# Altium PCB BlinkBoard.PcbDoc (part 1 of 2)
Units mm, origin at the board's own origin, x right, y up, seen from the top; angles counter-clockwise.
Board outline 80 x 102 mm, 4 copper layers (Top Layer, Int1 (GND), Int2 (PWR), Bottom Layer), stack 1.369 mm thick; 153 components, 150 nets, 495 pads, 127 vias.
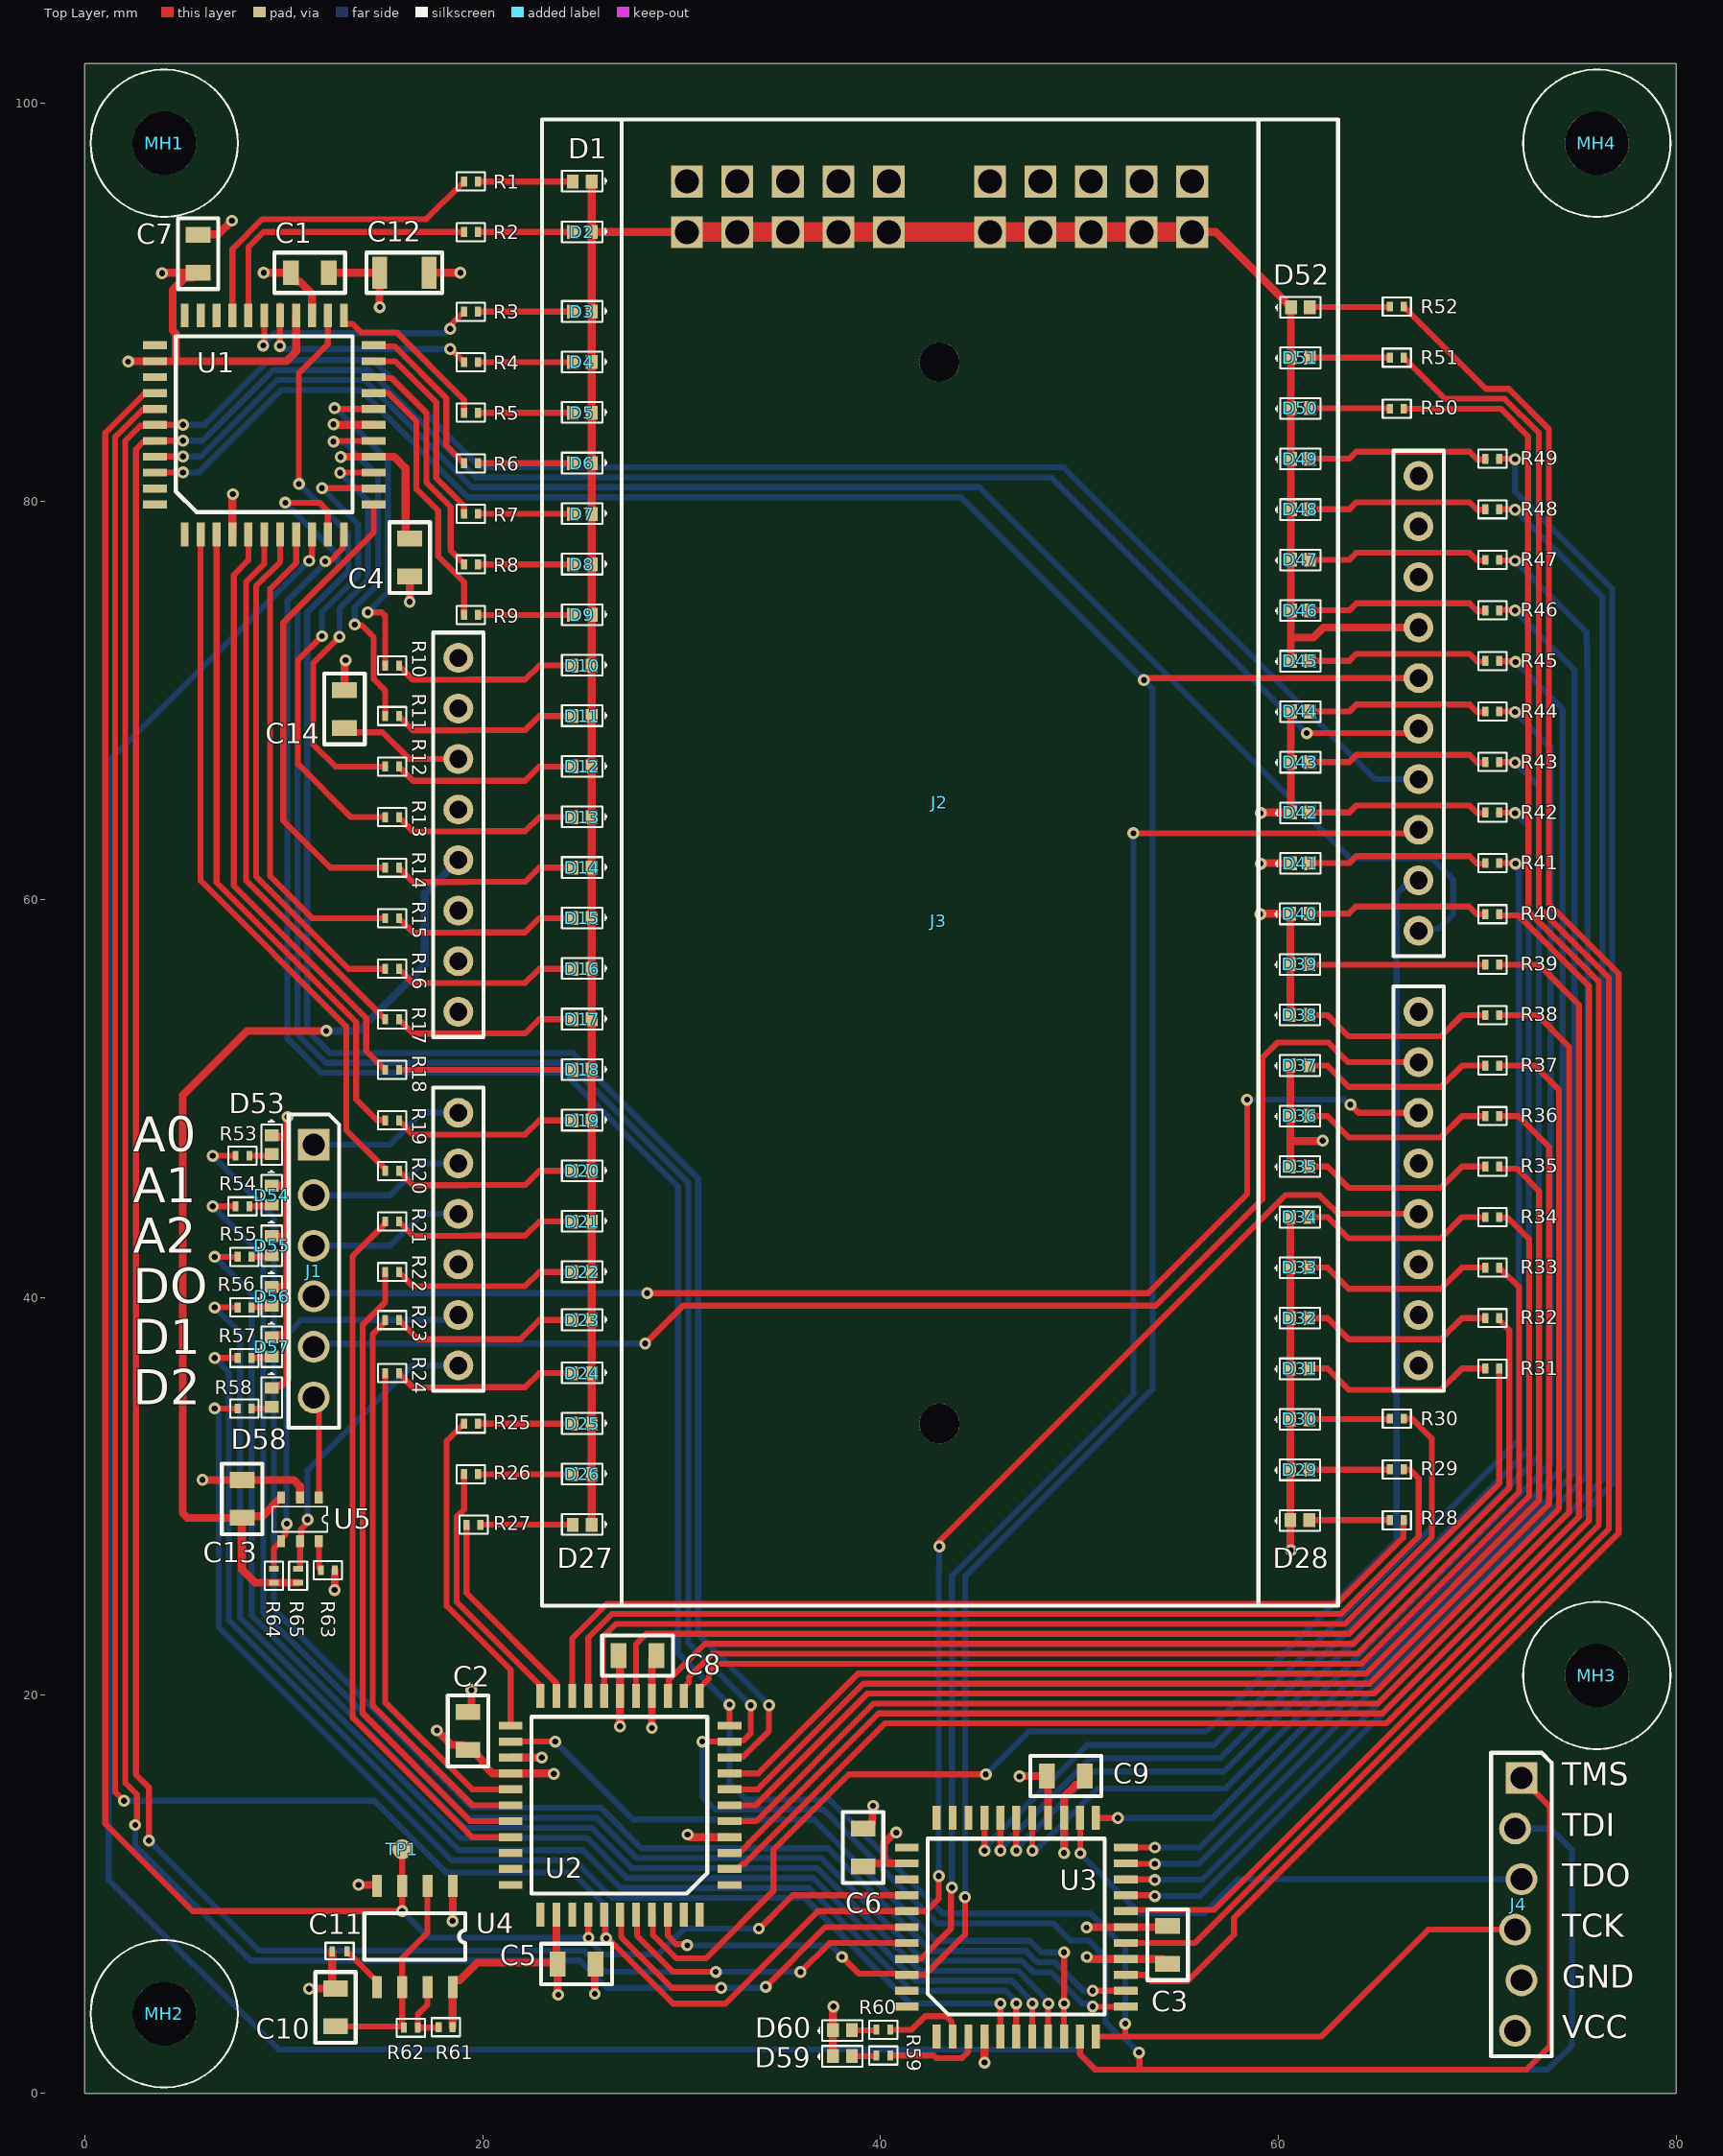
[diagram p0: Top Layer view]
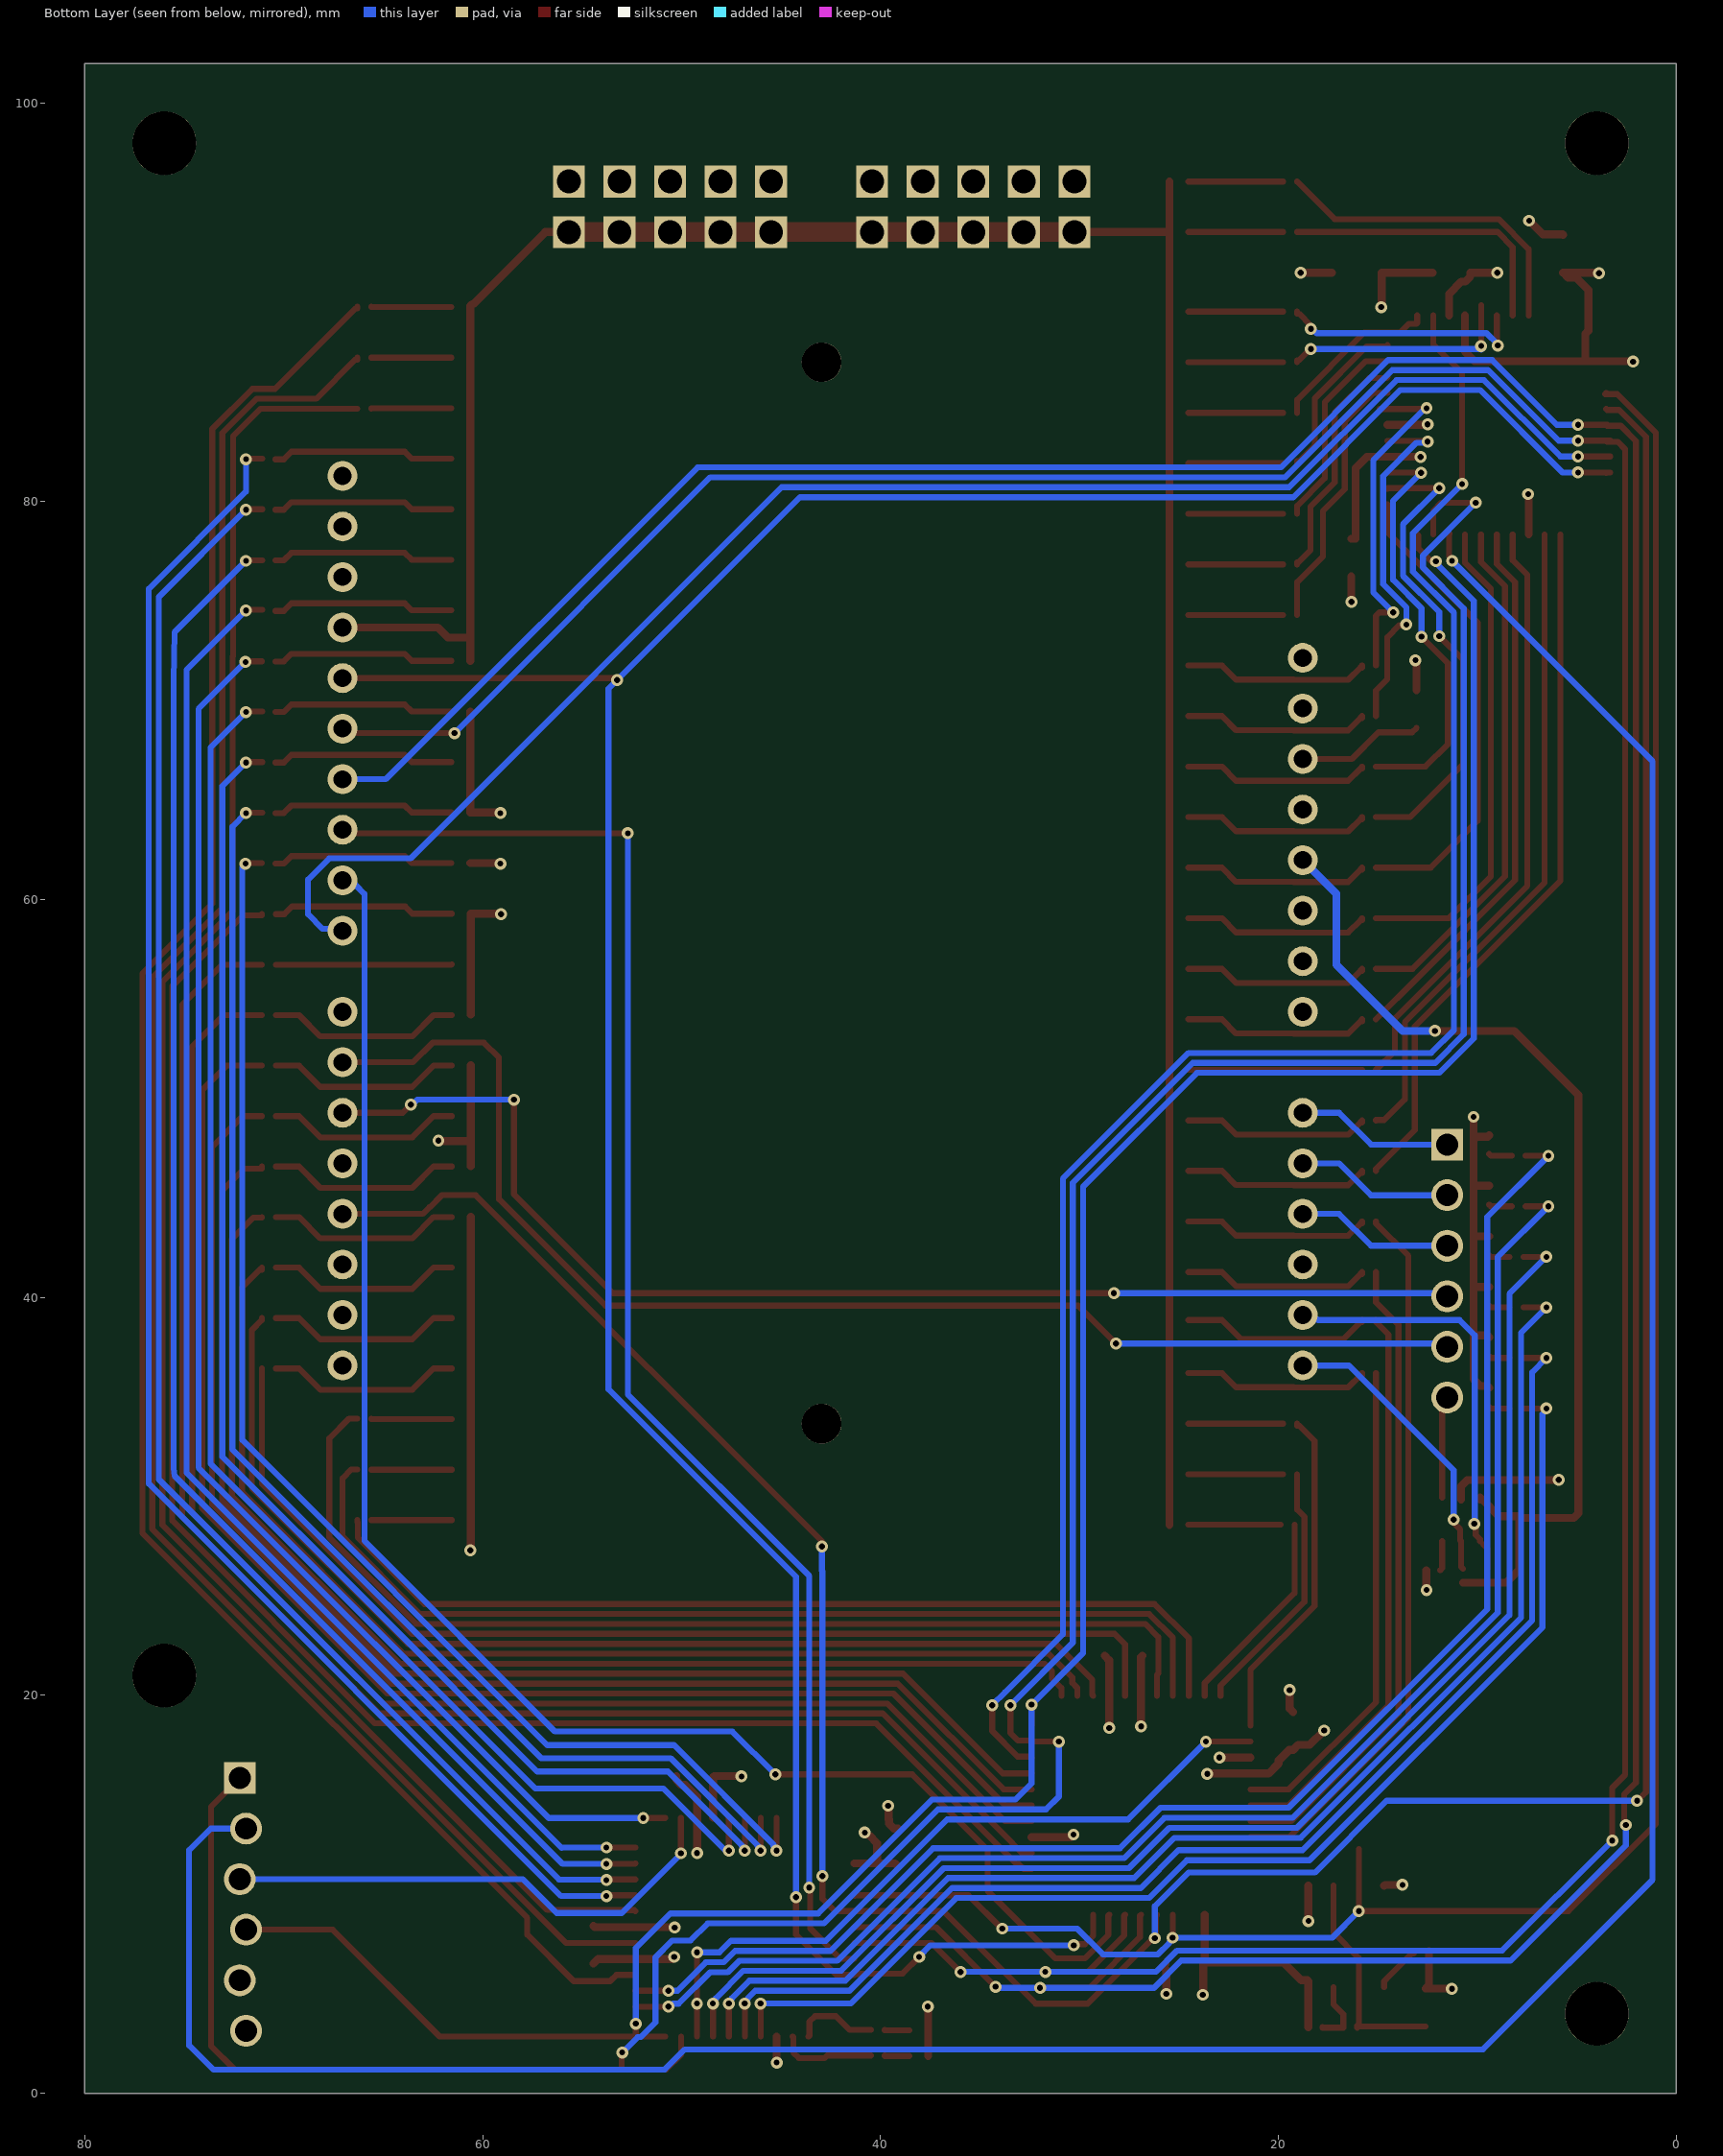
[diagram p1: Bottom Layer view, seen from below]
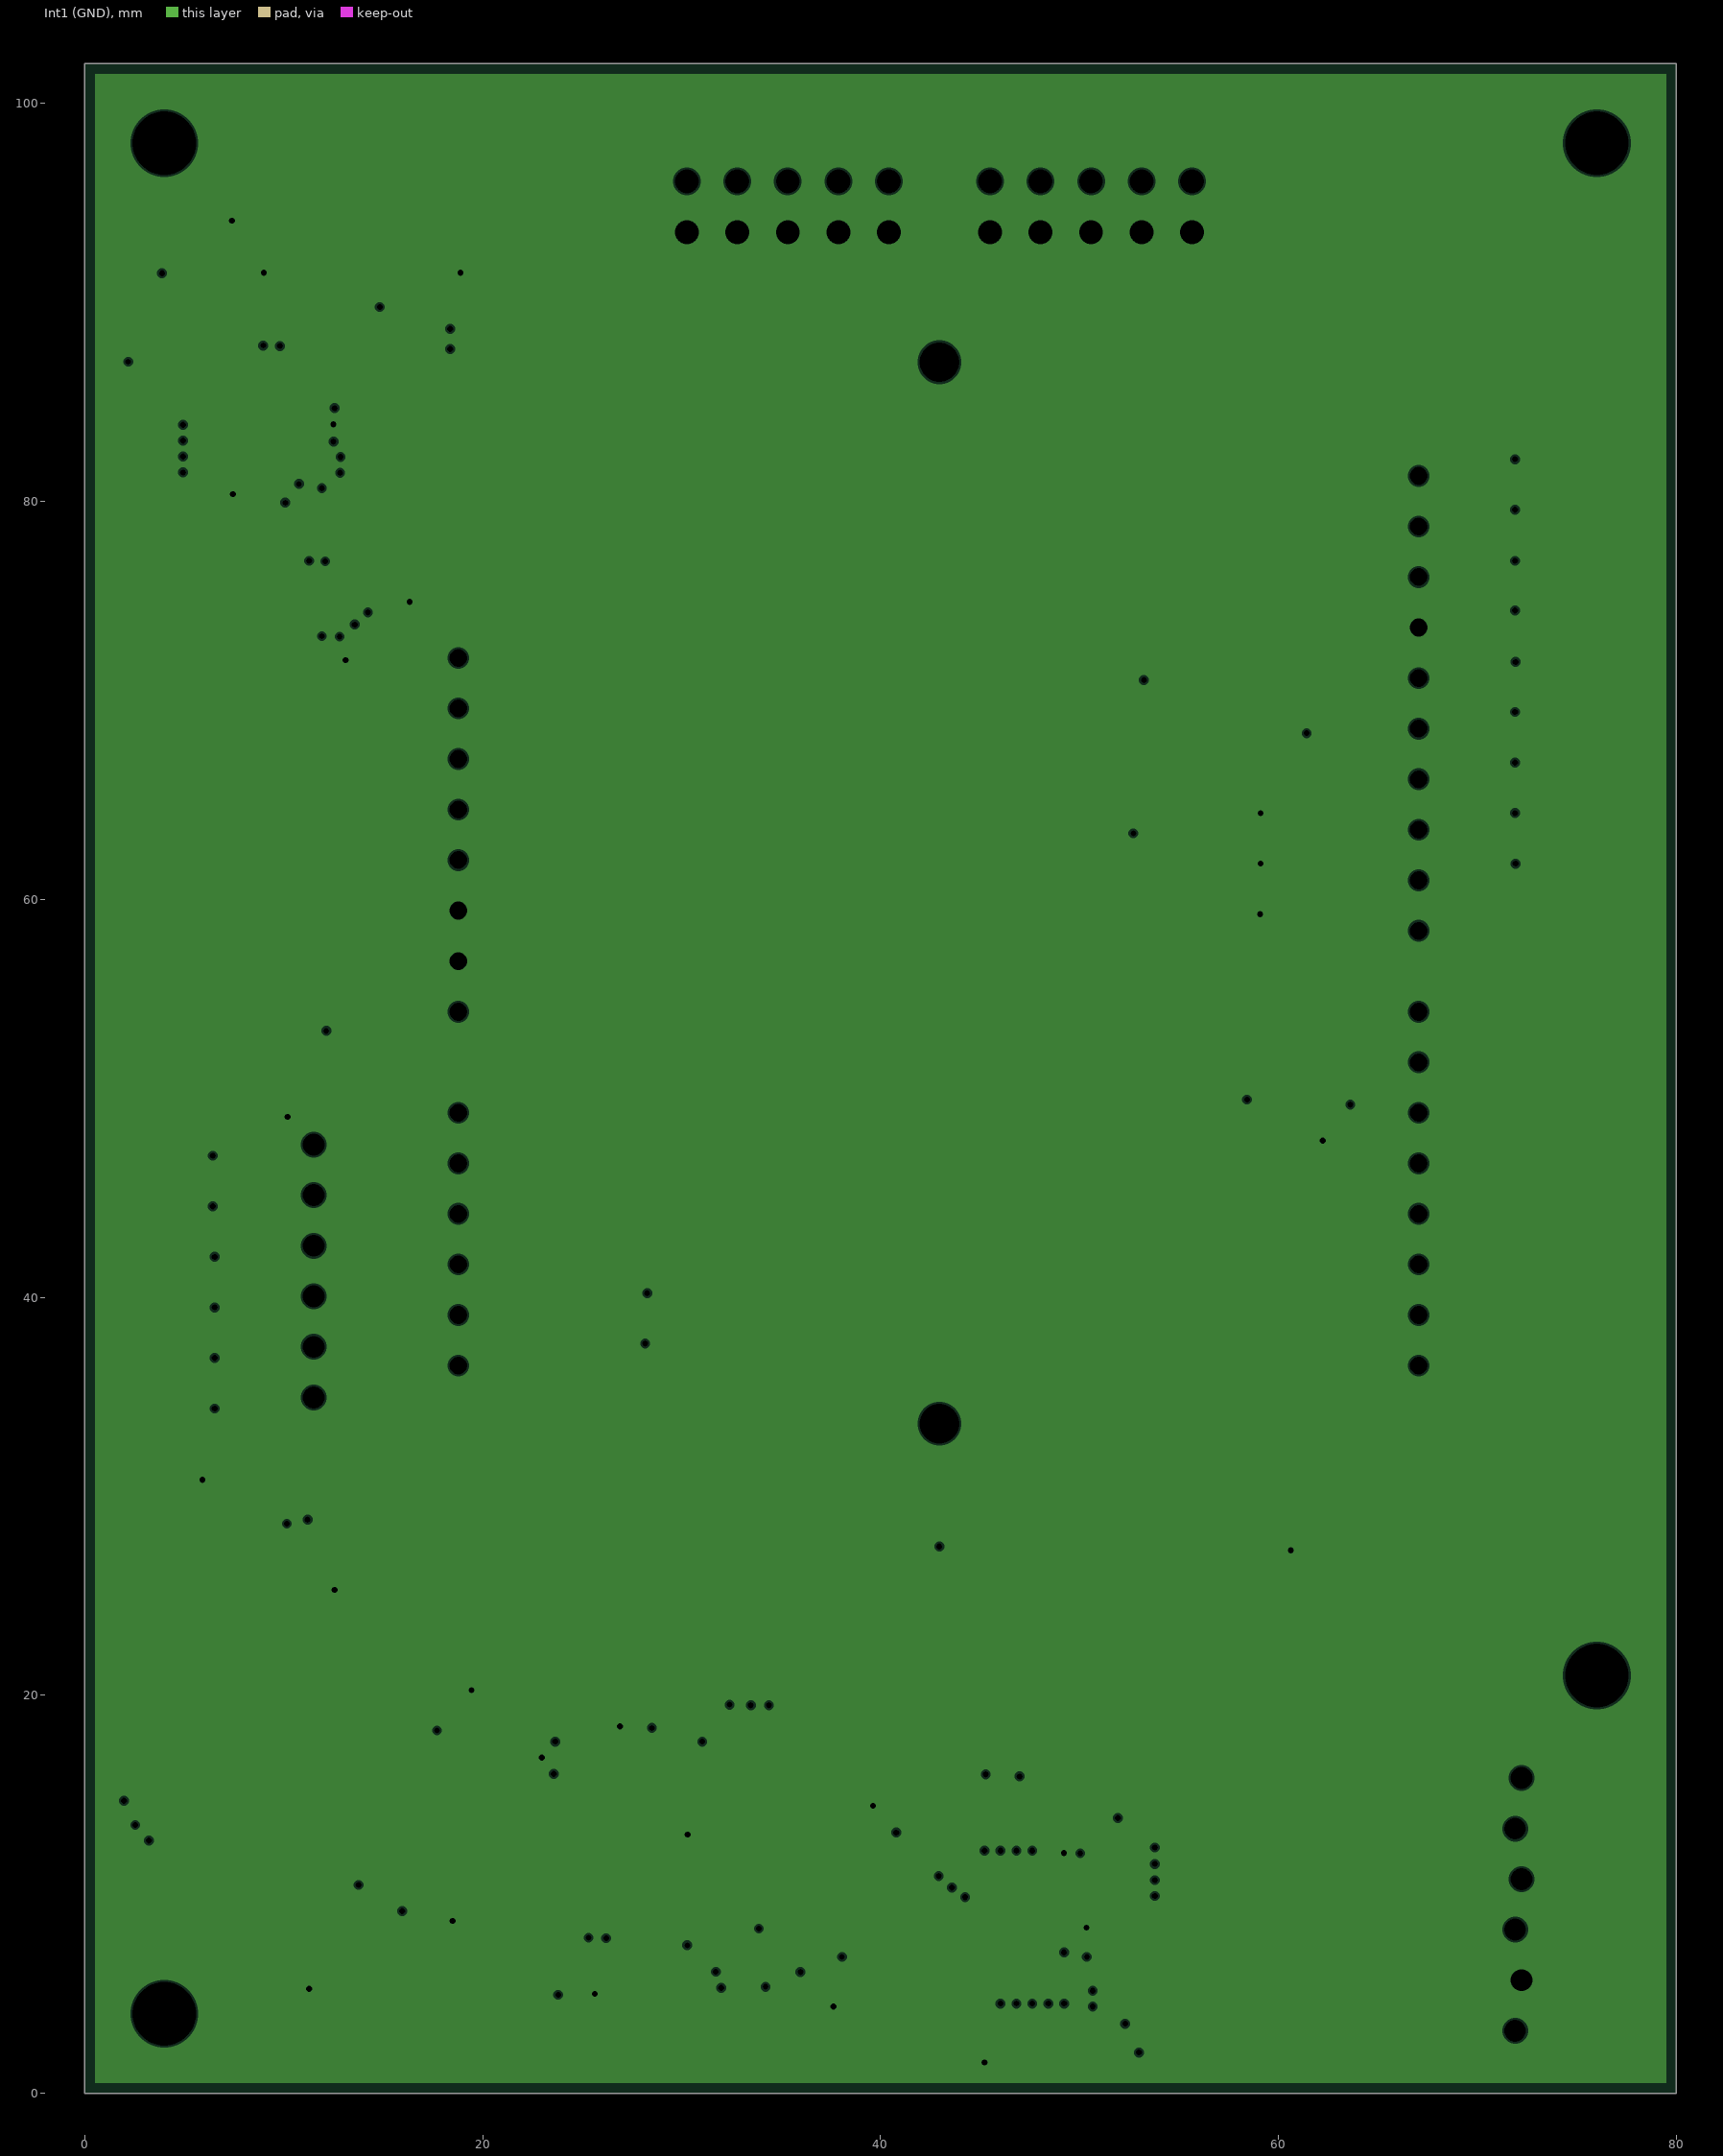
[diagram p2: Int1 (GND), clearances drawn from the general rule]
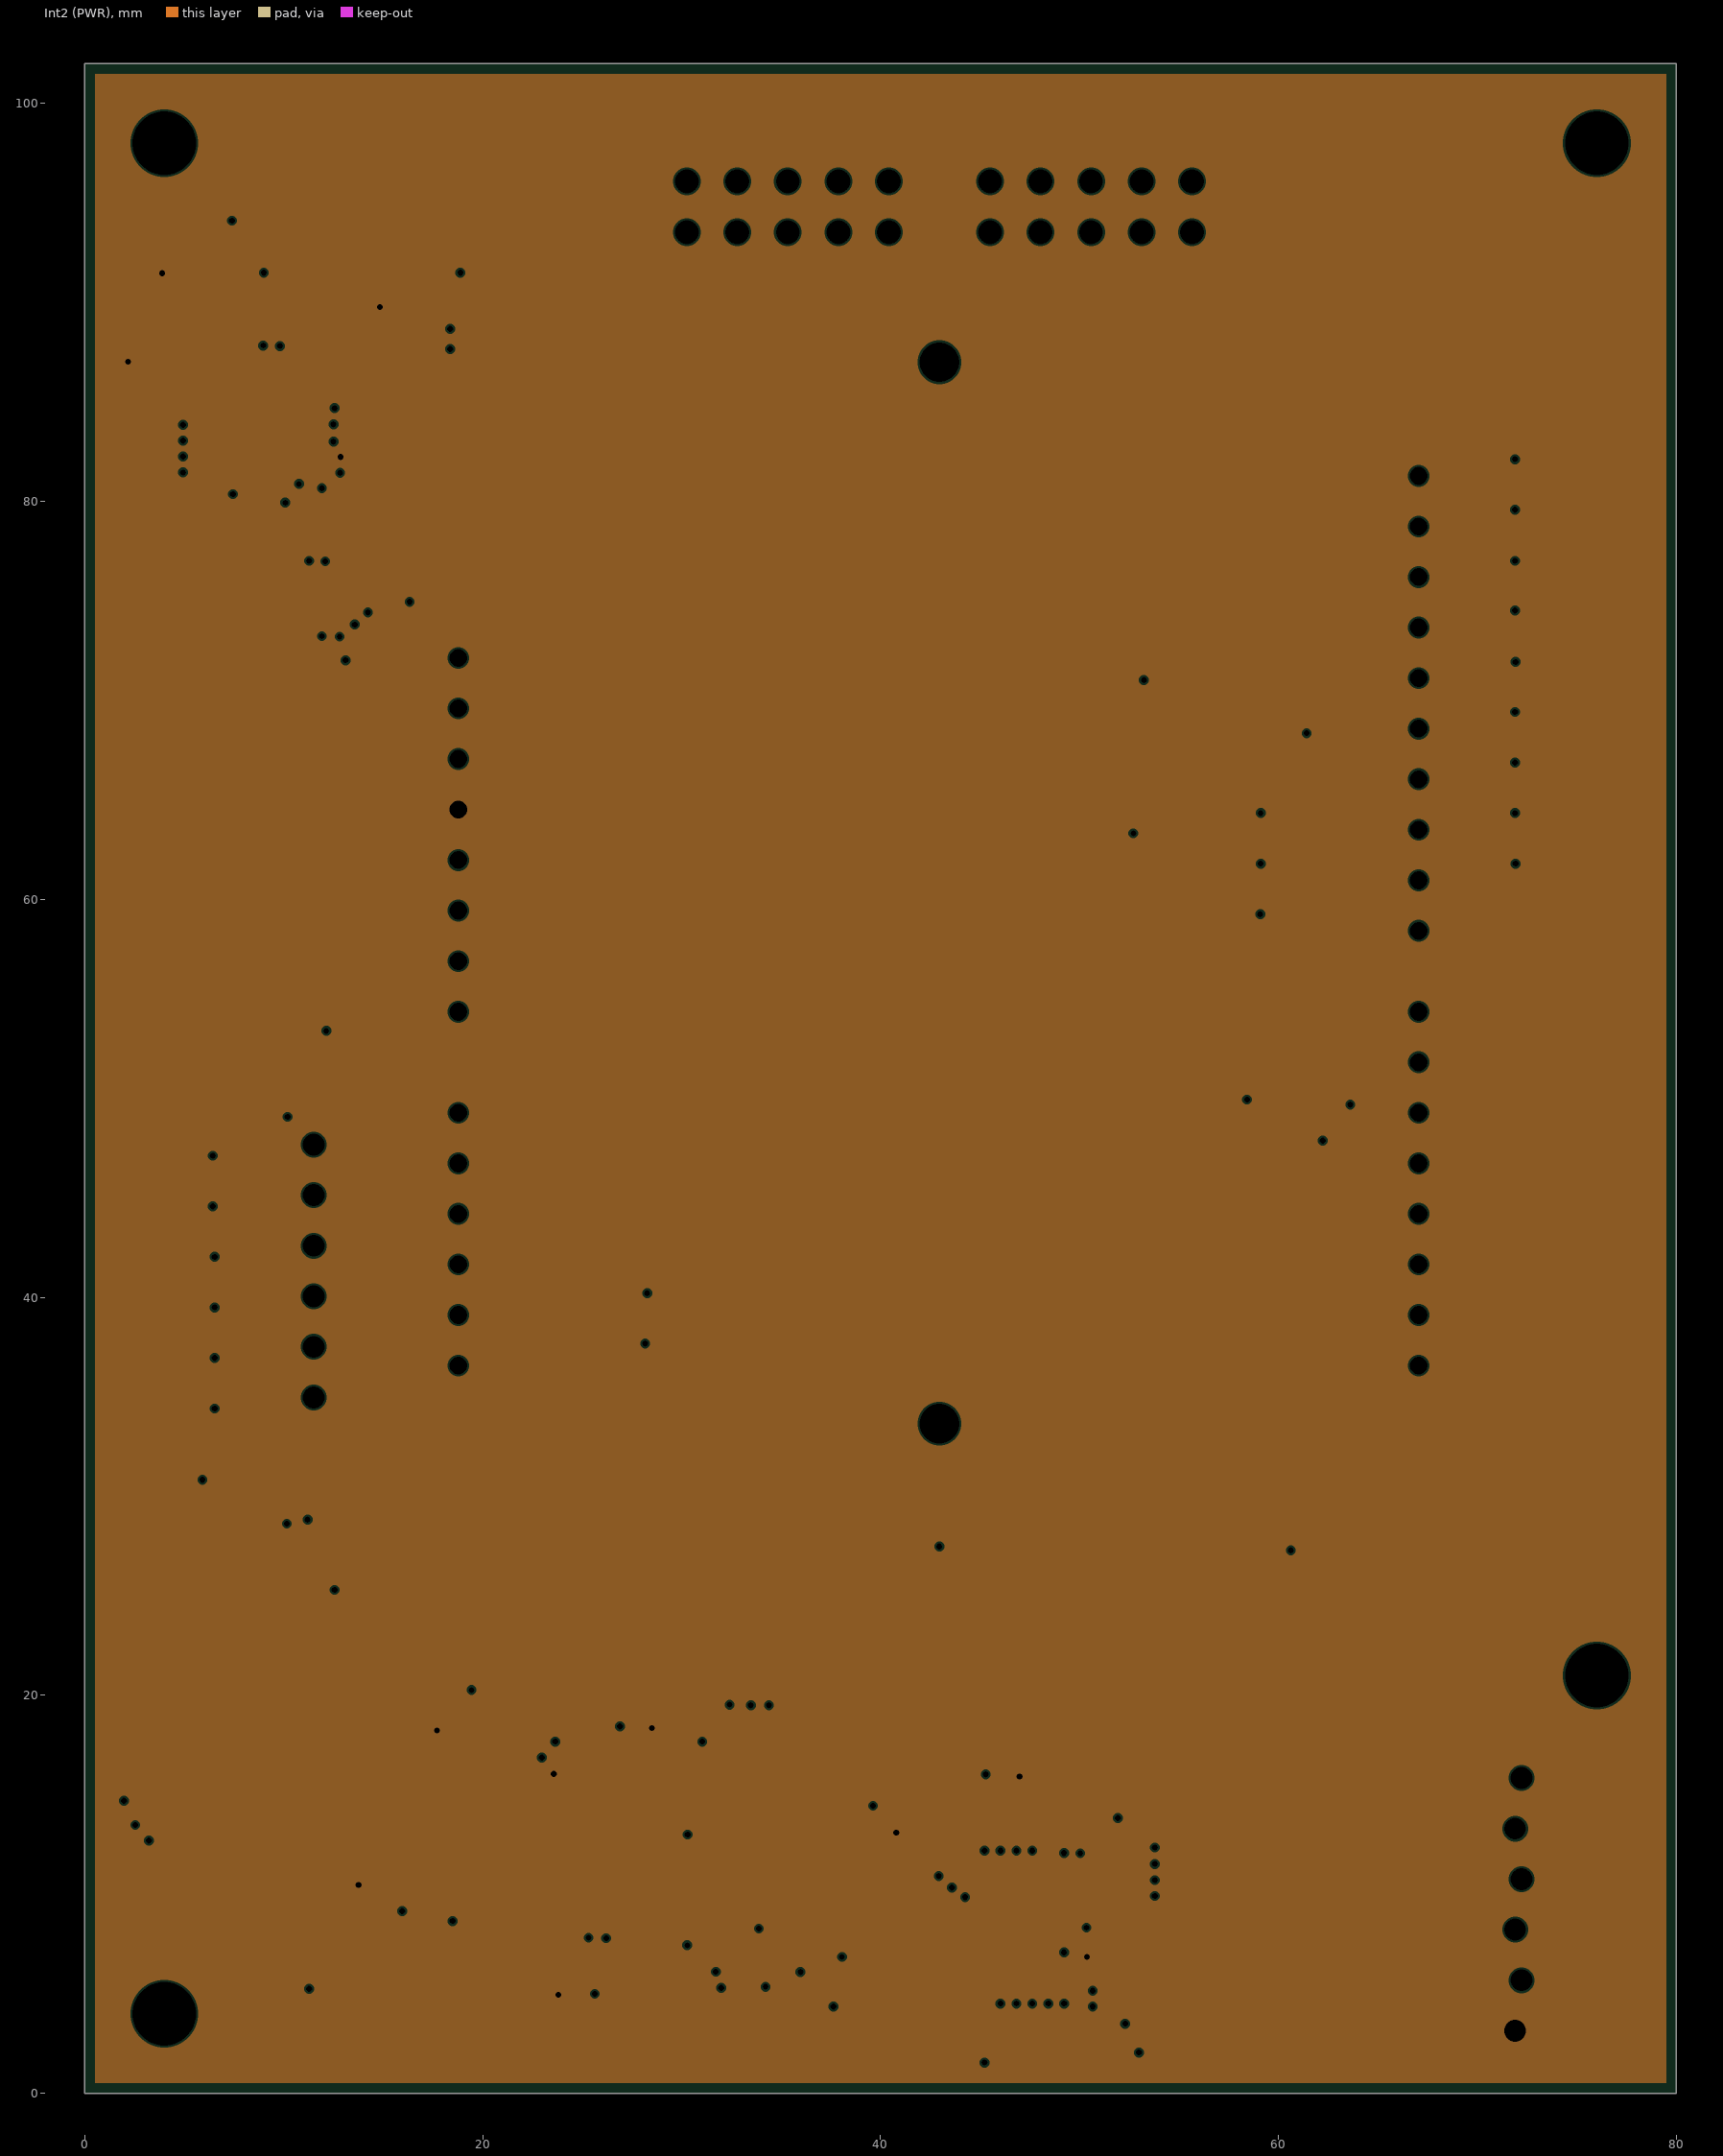
[diagram p3: Int2 (PWR), clearances drawn from the general rule]
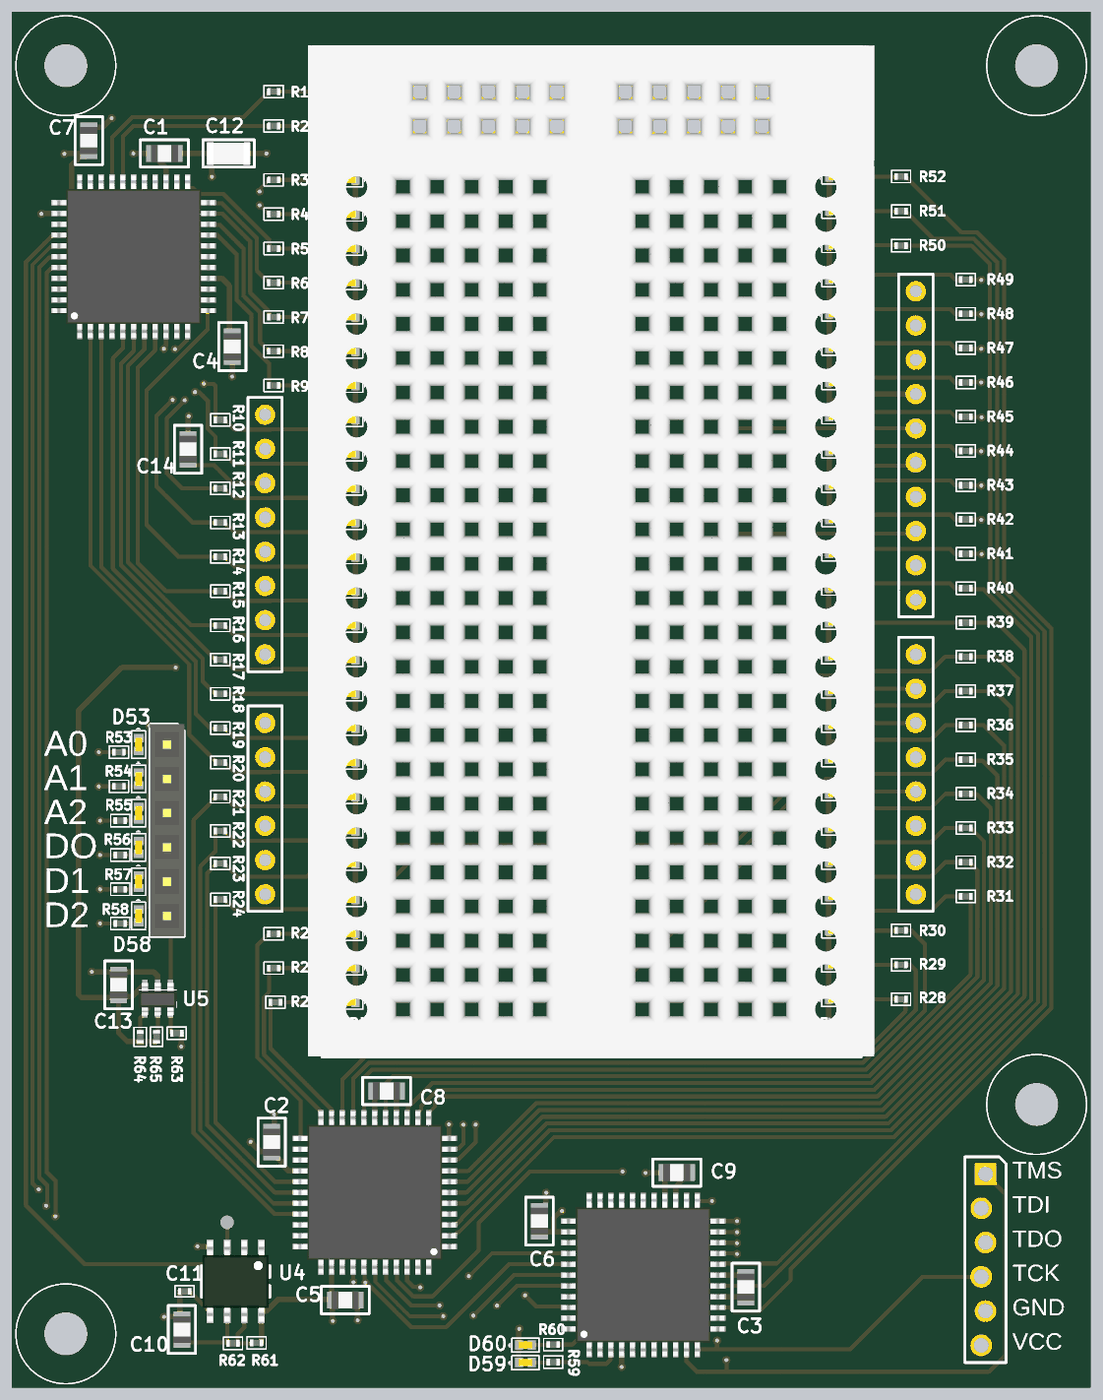
[diagram p5: 3D render of the assembled board from above, using the file's embedded part models]

## Layer stack, top to bottom
Top Solder: solder mask 0.0254, SM-001, Dk 4
Top Layer: signal copper 0.035
Dielectric 1: prepreg 0.1295, PP-017, Dk 4.3
Dielectric 2: prepreg 0.1295, PP-017, Dk 4.3
Int1 (GND): plane copper 0.035, net GND
Dielectric 3: core 0.7112, Core-039, Dk 4.8
Int2 (PWR): plane copper 0.035, net +3V3
Dielectric 4: prepreg 0.1295, PP-017, Dk 4.3
Dielectric 5: prepreg 0.1295, PP-017, Dk 4.3
Bottom Layer: signal copper 0.035
Bottom Solder: solder mask 0.0254, SM-001, Dk 4

## Board outline
0,0 80,0 80,102 0,102

## Design rules (kind name [scope] priority, off if disabled: settings)
Clearance "Around polygon" [IsRegion] p1: gap=0.3 ignorepadtopadclearanceinfootprint=FALSE
Clearance [All] p2: gap=0.2 ignorepadtopadclearanceinfootprint=FALSE
ComponentClearance [All] p1: gap=0.2 collisioncheckmode=3 verticalgap=0.2 showdistances=FALSE
ComponentClearance ComponentClearance_J2 [InComponent('J2')] p2: gap=0.2 collisioncheckmode=3 verticalgap=0 showdistances=FALSE
ComponentClearance ComponentClearance_J3 [InComponent('J3')] p3: gap=0.2 collisioncheckmode=3 verticalgap=0 showdistances=FALSE
HoleSize [All] p1: absolutevalues=TRUE maxlimit=3.5 minlimit=0.2 maxpercent=80.000 minpercent=20.000
HoleToHoleClearance [All] p1: gap=0.305 allowstackedmicrovias=TRUE
MinimumSolderMaskSliver [All] p1: minsoldermaskwidth=0.3
PlaneClearance [All] p1: clearance=0.1
PlaneConnect [All] p1: planeconnectstyle=Direct reliefexpansion=0.508 reliefentries=4 reliefconductorwidth=0.254 reliefairgap=0.254
PolygonConnect [All] p1: connectstyle=Direct reliefconductorwidth=0.254 reliefentries=4 polygonreliefangle="90 Angle" airgapwidth=0.254
RoutingVias [All] p1: holewidth=0.3 width=0.6 viastyle="Through Hole" minholewidth=0.3 minwidth=0.6 maxholewidth=0.3 maxwidth=0.6
SilkToSilkClearance [All] p1: silktosilkclearance=0.1
SilkToSolderMaskClearance [IsPad] p1: minsilkscreentomaskgap=0.1 clearancetoexposedcopper=TRUE
SolderMaskExpansion [All] p1: expansion=0.02
Width Width_POWER [InNet ('+*') or InNet('GND')] p1: maxlimit=3 minlimit=0.4 preferedwidth=0.4
Width [All] p2: maxlimit=0.5 minlimit=0.3 preferedwidth=0.4
22 further rules are at their usual default settings.

## Classes and differential pairs
component class LEDcontroller: C1 C2 C3 C4 C5 C6 C7 C8 C9 D1 D2 D3 D4 D5 D6 D7 D8 D9 D10 D11 D12 D13 D14 D15 D16 D17 D18 D19 D20 D21 D22 D23 D24 D25 D26 D27 D28 D29 D30 D31 D32 D33 D34 D35 D36 D37 D38 D39 D40 D41 D42 D43 D44 D45 D46 D47 D48 D49 D50 D51 D52 D53 D54 D55 D56 D57 D58 D59 D60 R1 R2 R3 R4 R5 R6 R7 R8 R9 R10 R11 R12 R13 R14 R15 R16 R17 R18 R19 R20 R21 R22 R23 R24 R25 R26 R27 R28 R29 R30 R31 R32 R33 R34 R35 R36 R37 R38 R39 R40 R41 R42 R43 R44 R45 R46 R47 R48 R49 R50 R51 R52 R53 R54 R55 R56 R57 R58 R59 R60 U1 U2 U3
component class BlinkBoard: C10 C11 C12 C13 C14 J1 J2 J3 J4 MH1 MH2 MH3 MH4 R61 R62 R63 R64 R65 TP1 U4 U5

## Components (designator, comment, footprint, x,y, rotation, side; value= is the part's Value field where it differs from the comment)
C1 "47n" C0805 11.312,91.49 r0 top
C2 "47n" C0805 19.263,18.211 r270 top
C3 "47n" C0805 54.432,7.468 r270 top
C4 "47n" C0805 16.342,77.174 r90 top
C5 "47n" C0805 24.724,6.501 r180 top
C6 "47n" C0805 39.125,12.356 r270 top
C7 "47n" C0805 5.699,92.445 r270 top
C8 "47n" C0805 27.788,21.996 r0 top
C9 "47n" C0805 49.311,15.95 r180 top
C10 "1u" C0805 12.608,4.317 r270 top
C11 "10n" C0402 12.811,7.136 r0 top
C12 "100u" C1206 16.068,91.49 r180 top
C13 "1u" C0805 7.909,29.869 r270 top
C14 "10u" C0805 13.063,69.571 r270 top
D1 "LED0402_RED" LED0402 25.003,96.074 r0 top
D2 "LED0402_RED" LED0402 25.003,93.534 r0 top
D3 "LED0402_RED" LED0402 25.003,89.534 r0 top
D4 "LED0402_RED" LED0402 25.003,86.994 r0 top
D5 "LED0402_RED" LED0402 25.003,84.454 r0 top
D6 "LED0402_RED" LED0402 25.003,81.914 r0 top
D7 "LED0402_RED" LED0402 25.003,79.374 r0 top
D8 "LED0402_RED" LED0402 25.003,76.834 r0 top
D9 "LED0402_RED" LED0402 25.003,74.294 r0 top
D10 "LED0402_RED" LED0402 25.003,71.754 r0 top
D11 "LED0402_RED" LED0402 25.003,69.214 r0 top
D12 "LED0402_RED" LED0402 25.003,66.674 r0 top
D13 "LED0402_RED" LED0402 25.003,64.134 r0 top
D14 "LED0402_RED" LED0402 25.003,61.594 r0 top
D15 "LED0402_RED" LED0402 25.003,59.054 r0 top
D16 "LED0402_RED" LED0402 25.003,56.514 r0 top
D17 "LED0402_RED" LED0402 25.003,53.974 r0 top
D18 "LED0402_RED" LED0402 25.003,51.434 r0 top
D19 "LED0402_RED" LED0402 25.003,48.894 r0 top
D20 "LED0402_RED" LED0402 25.003,46.354 r0 top
D21 "LED0402_RED" LED0402 25.003,43.814 r0 top
D22 "LED0402_RED" LED0402 25.003,41.274 r0 top
D23 "LED0402_RED" LED0402 25.003,38.861 r0 top
D24 "LED0402_RED" LED0402 25.003,36.194 r0 top
D25 "LED0402_RED" LED0402 25.003,33.654 r0 top
D26 "LED0402_RED" LED0402 25.003,31.114 r0 top
D27 "LED0402_RED" LED0402 25.003,28.574 r0 top
D28 "LED0402_RED" LED0402 61.071,28.803 r180 top
D29 "LED0402_RED" LED0402 61.071,31.343 r180 top
D30 "LED0402_RED" LED0402 61.071,33.883 r180 top
D31 "LED0402_RED" LED0402 61.071,36.423 r180 top
D32 "LED0402_RED" LED0402 61.071,38.963 r180 top
D33 "LED0402_RED" LED0402 61.071,41.503 r180 top
D34 "LED0402_RED" LED0402 61.071,44.043 r180 top
D35 "LED0402_RED" LED0402 61.071,46.583 r180 top
D36 "LED0402_RED" LED0402 61.071,49.123 r180 top
D37 "LED0402_RED" LED0402 61.071,51.663 r180 top
D38 "LED0402_RED" LED0402 61.071,54.203 r180 top
D39 "LED0402_RED" LED0402 61.071,56.743 r180 top
D40 "LED0402_RED" LED0402 61.071,59.283 r180 top
D41 "LED0402_RED" LED0402 61.096,61.823 r180 top
D42 "LED0402_RED" LED0402 61.096,64.363 r180 top
D43 "LED0402_RED" LED0402 61.096,66.903 r180 top
D44 "LED0402_RED" LED0402 61.096,69.443 r180 top
D45 "LED0402_RED" LED0402 61.096,71.983 r180 top
D46 "LED0402_RED" LED0402 61.096,74.523 r180 top
D47 "LED0402_RED" LED0402 61.096,77.063 r180 top
D48 "LED0402_RED" LED0402 61.096,79.603 r180 top
D49 "LED0402_RED" LED0402 61.096,82.143 r180 top
D50 "LED0402_RED" LED0402 61.096,84.683 r180 top
D51 "LED0402_RED" LED0402 61.096,87.223 r180 top
D52 "LED0402_RED" LED0402 61.096,89.763 r180 top
D53 "LED0402_RED" LED0402 9.407,47.675 r90 top
D54 "LED0402_RED" LED0402 9.407,45.135 r90 top
D55 "LED0402_RED" LED0402 9.407,42.595 r90 top
D56 "LED0402_RED" LED0402 9.407,40.055 r90 top
D57 "LED0402_RED" LED0402 9.407,37.515 r90 top
D58 "LED0402_RED" LED0402 9.407,34.975 r90 top
D59 "LED0402_RED" LED0402 38.084,1.879 r180 top
D60 "LED0402_RED" LED0402 38.084,3.174 r180 top
J1 "HDR_6_PINS" HDR6_100MIL 11.516,47.675 r270 top
J2 "BREADBOARD" BREADBOARD 28.94,89.534 r0 top locked
J3 "UNO_SHEILD" ARDUINO_UNO_SHIELD 67.04,36.575 r270 top locked
J4 "JTAG CPLD" JTAG 72.209,15.846 r270 top
MH1 "MH 3.2mm NP" MH3.2MM 4,98 r0 top
MH2 "MH 3.2mm NP" MH3.2MM 4,4 r0 top
MH3 "MH 3.2mm NP" MH3.2MM 76,21 r0 top
MH4 "MH 3.2mm NP" MH3.2MM 76,98 r0 top
R1 "62" RES0402 19.415,96.074 r0 top
R2 "62" RES0402 19.415,93.534 r0 top
R3 "62" RES0402 19.415,89.534 r0 top
R4 "62" RES0402 19.415,86.994 r0 top
R5 "62" RES0402 19.415,84.454 r0 top
R6 "62" RES0402 19.415,81.914 r0 top
R7 "62" RES0402 19.415,79.374 r0 top
R8 "62" RES0402 19.415,76.834 r0 top
R9 "62" RES0402 19.415,74.294 r0 top
R10 "62" RES0402 15.453,71.754 r0 top
R11 "62" RES0402 15.453,69.214 r0 top
R12 "62" RES0402 15.453,66.674 r0 top
R13 "62" RES0402 15.453,64.134 r0 top
R14 "62" RES0402 15.453,61.594 r0 top
R15 "62" RES0402 15.453,59.054 r0 top
R16 "62" RES0402 15.453,56.514 r0 top
R17 "62" RES0402 15.453,53.974 r0 top
R18 "62" RES0402 15.453,51.434 r0 top
R19 "62" RES0402 15.453,48.894 r0 top
R20 "62" RES0402 15.453,46.354 r0 top
R21 "62" RES0402 15.453,43.814 r0 top
R22 "62" RES0402 15.453,41.274 r0 top
R23 "62" RES0402 15.453,38.861 r0 top
R24 "62" RES0402 15.453,36.194 r0 top
R25 "62" RES0402 19.415,33.654 r0 top
R26 "62" RES0402 19.415,31.114 r0 top
R27 "62" RES0402 19.542,28.574 r0 top
R28 "62" RES0402 65.948,28.803 r180 top
R29 "62" RES0402 65.948,31.356 r180 top
R30 "62" RES0402 65.948,33.908 r180 top
R31 "62" RES0402 70.748,36.423 r180 top
R32 "62" RES0402 70.748,38.96 r180 top
R33 "62" RES0402 70.748,41.498 r180 top
R34 "62" RES0402 70.748,44.035 r180 top
R35 "62" RES0402 70.748,46.572 r180 top
R36 "62" RES0402 70.748,49.109 r180 top
R37 "62" RES0402 70.748,51.646 r180 top
R38 "62" RES0402 70.748,54.183 r180 top
R39 "62" RES0402 70.748,56.72 r180 top
R40 "62" RES0402 70.748,59.257 r180 top
R41 "62" RES0402 70.748,61.823 r180 top
R42 "62" RES0402 70.748,64.363 r180 top
R43 "62" RES0402 70.748,66.903 r180 top
R44 "62" RES0402 70.748,69.443 r180 top
R45 "62" RES0402 70.748,71.983 r180 top
R46 "62" RES0402 70.748,74.523 r180 top
R47 "62" RES0402 70.748,77.063 r180 top
R48 "62" RES0402 70.748,79.603 r180 top
R49 "62" RES0402 70.748,82.143 r180 top
R50 "62" RES0402 65.948,84.657 r180 top
R51 "62" RES0402 65.948,87.223 r180 top
R52 "62" RES0402 65.948,89.788 r180 top
R53 "62" RES0402 7.934,47.116 r0 top
R54 "62" RES0402 7.934,44.576 r0 top
R55 "62" RES0402 8.036,42.036 r0 top
R56 "62" RES0402 8.036,39.496 r0 top
R57 "62" RES0402 8.036,36.956 r0 top
R58 "62" RES0402 8.036,34.416 r0 top
R59 "62" RES0402 40.141,1.904 r180 top
R60 "62" RES0402 40.141,3.199 r180 top
R61 "47k" RES0402 18.145,3.326 r0 top
R62 "120k" RES0402 16.392,3.301 r0 top
R63 "10k" RES0402 12.226,26.288 r180 top
R64 "10k" RES0402 9.509,26.009 r270 top
R65 "10k" RES0402 10.728,26.014 r270 top
TP1 "TEST POINT" "TEST POINT" 15.961,12.267 r90 top
U1 "XC9572XL-10VQG44C" VQFP44 9.026,83.844 r90 top locked
U2 "XC9572XL-10VQG44C" VQFP44 26.908,14.477 r180 top locked
U3 "XC9572XL-10VQG44C" VQFP44 46.822,8.356 r90 top locked
U4 "NE555DR" 8-SOIC 16.596,7.883 r270 top locked
U5 "MCP4725A0T-E/CH (2)" SOT23-6 10.83,28.853 r270 top locked

## Footprints (in the part's own frame and the unit in brackets; to place one, negate y for a bottom-side part, rotate by r counter-clockwise, add the part's x,y. Pads: shape width x height; smd on the part's side, far side on the other; paste and mask are expansions set on the pad)
8-SOIC [mm]
  rect 1.1x0.5 smd mask+0.02: 1(-2.55,1.905) 2(-2.55,0.635) 3(-2.55,-0.635) 4(-2.55,-1.905) 5(2.55,-1.905) 6(2.55,-0.635) 7(2.55,0.635) 8(2.55,1.905)
  silkscreen extent -1.17,-2.54 1.17,2.54, body extent -3,-2.45 3,2.45, height 1.75
ARDUINO_UNO_SHIELD [mm]
  round 1.5 hole 0.9: 1(0,0) 2(-2.54,0) 3(-5.08,0) 4(-7.62,0) 5(-10.16,0) 6(-12.7,0) 7(-15.24,0) 8(-17.78,0) 9(-21.844,0) 10(-24.384,0) 11(-26.924,0) 12(-29.464,0) 13(-32.004,0) 14(-34.544,0) 15(-37.084,0) 16(-39.624,0) 17(0,-48.26) 18(-2.54,-48.26) 19(-5.08,-48.26) 20(-7.62,-48.26) 21(-10.16,-48.26) 22(-12.7,-48.26) 23(-17.78,-48.26) 24(-20.32,-48.26) 25(-22.86,-48.26) 26(-25.4,-48.26) 27(-27.94,-48.26) 28(-30.48,-48.26) 29(-33.02,-48.26) ""(-44.704,0) ""(-42.164,0) ""(-35.56,-48.26)
  silkscreen extent -45.97,-49.53 1.27,1.27
BREADBOARD [mm]
  rect 1.6x1.6 hole 1.2: 1(1.321,6.54) 1(3.861,6.54) 1(6.401,6.54) 1(8.941,6.54) 1(11.481,6.54) 1(16.561,6.54) 1(19.101,6.54) 1(21.641,6.54) 1(24.181,6.54) 1(26.721,6.54) 2(1.321,4) 2(3.861,4) 2(6.401,4) 2(8.941,4) 2(11.481,4) 2(16.561,4) 2(19.101,4) 2(21.641,4) 2(24.181,4) 2(26.721,4)
  round 2 hole 2 unplated: ""(14.021,-55.88) ""(14.021,-2.54)
  silkscreen extent -5.95,-65.02 34.05,9.65, body extent -6.98,-64.98 35.02,9.99, height 8.31
C0402 [mm]
  rect 0.25x0.5 smd mask+0.02: 1(-0.375,0) 2(0.375,0)
  silkscreen extent -0.71,-0.41 0.71,0.43, body extent -0.5,-0.25 0.5,0.25, height 0.25
C0805 [mm]
  rect 0.8x1.25 smd mask+0.02: 1(-0.95,0) 2(0.95,0)
  silkscreen extent -1.78,-1.02 1.78,1.02, body extent -1,-0.66 1,0.66, height 0.74
C1206 [mm]
  rect 0.75x1.6 smd mask+0.02: 1(-1.25,0) 2(1.25,0)
  silkscreen extent -1.91,-1.02 1.91,1.02, body extent -1.6,-0.83 1.6,0.83, height 1.57
HDR6_100MIL [mm]
  rect 1.6x1.6 hole 1.1: 1(0,0)
  round 1.6 hole 1.1: 2(2.54,0) 3(5.08,0) 4(7.62,0) 5(10.16,0) 6(12.7,0)
  silkscreen extent -1.52,-1.27 14.22,1.27, body extent -1.52,-1.27 14.22,1.27, height 8.51
JTAG [mm]
  rect 1.6x1.6 hole 1.1: 1(0,0)
  round 1.6 hole 1.1: 2(2.54,-0.317) 3(5.08,0) 4(7.62,-0.317) 5(10.16,0) 6(12.7,-0.317)
  silkscreen extent -1.27,-1.52 13.97,1.52
LED0402 [mm]
  rect 0.6x0.7 smd mask+0.02: 1(-0.475,0) 2(0.475,0)
  silkscreen extent -1.02,-0.51 1.27,0.53, body extent -0.5,-0.25 0.5,0.25, height 0.32
MH3.2MM [mm] "MHNP 3.2mm"
  round 3.2 hole 3.2 unplated: 1(0,0)
  silkscreen extent -3.7,-3.7 3.7,3.7
RES0402 [mm]
  rect 0.3x0.5 smd mask+0.02: 1(-0.35,0) 2(0.35,0)
  silkscreen extent -0.71,-0.46 0.71,0.46, body extent -0.5,-0.25 0.5,0.25, height 0.25
SOT23-6 [mm]
  rect 0.6x0.4 smd mask+0.02: 1(-1.092,0.94) 2(-1.092,-0.01) 3(-1.092,-0.96) 4(1.108,-0.96) 5(1.108,-0.01) 6(1.108,0.94)
  silkscreen extent -0.64,-1.4 0.64,1.37, body extent -1.16,-1.42 1.27,1.37, height 1.1
"TEST POINT" [mm]
  round 1 smd mask+0.02: 1(0,0)
VQFP44 [mm]
  rect 1.2x0.4 smd mask+0.02: 1(-5.5,4) 2(-5.5,3.2) 3(-5.5,2.4) 4(-5.5,1.6) 5(-5.5,0.8) 6(-5.5,0) 7(-5.5,-0.8) 8(-5.5,-1.6) 9(-5.5,-2.4) 10(-5.5,-3.2) 11(-5.5,-4) 23(5.5,-4) 24(5.5,-3.2) 25(5.5,-2.4) 26(5.5,-1.6) 27(5.5,-0.8) 28(5.5,0) 29(5.5,0.8) 30(5.5,1.6) 31(5.5,2.4) 32(5.5,3.2) 33(5.5,4)
  rect 0.4x1.2 smd mask+0.02: 12(-4,-5.5) 13(-3.2,-5.5) 14(-2.4,-5.5) 15(-1.6,-5.5) 16(-0.8,-5.5) 17(0,-5.5) 18(0.8,-5.5) 19(1.6,-5.5) 20(2.4,-5.5) 21(3.2,-5.5) 22(4,-5.5) 34(4,5.5) 35(3.2,5.5) 36(2.4,5.5) 37(1.6,5.5) 38(0.8,5.5) 39(0,5.5) 40(-0.8,5.5) 41(-1.6,5.5) 42(-2.4,5.5) 43(-3.2,5.5) 44(-4,5.5)
  silkscreen extent -4.38,-4.44 4.44,4.44, body extent -6.01,-6.01 6.01,6.01, height 1.35

## Part data
C1 C2 C3 C4 C5 C6 C7 C8 C9: library part C0805_47n, "Cap Ceramic 0.047uF 50V X7R 5% SMD 0805 125C Paper T/R", Capacitance=47nF, Case/Package=0805, Case Code (Metric)=2012, Dielectric=X7R, Manufacturer=Yageo, Manufacturer Part Number=CC0805JRX7R9BB473, Max Operating Temperature=125°C, Min Operating Temperature=-55°C, Supplier Part Number 1=311-3553-6-ND, Tolerance=5%, Voltage Rating=50V, Case Code (Imperial)=0805, ComponentLink4Description=https://datasheet.ciiva.com/11587/upy-gphc-x7r-6-3v-to-50v-8-11587207.pdf?src-supplier=Avnet, ComponentLink4URL=https://datasheet.ciiva.com/11587/upy-gphc-x7r-6-3v-to-50v-8-11587207.pdf?src-supplier=Avnet, Composition=Ceramic, Depth=1.25mm, Halogen Free="Halogen Free", Height=0.85mm, Lead Free="Lead Free", Length=2mm, Mount="Surface Mount", Packaging="Tape and Reel", Pricing 1="1 = 0.21000, 10 = 0.14700, 100 = 0.06900, 500 = 0.04838, 1000 = 0.04005 (USD)", Radiation Hardening=No, RoHS=Yes, Stock 1=8317, Supplier 1=Digi-Key, Termination=SMD/SMT, Thickness=0.037inch, Voltage Rating (DC)=50V, Weight=0.000194oz, Width=1.25mm
C10 C13: library part C0805_1u, "CERAMIC CAPACITOR, 1UF, 25V, Y5V, +80, -20%, 0805, FULL REEL; Product Range:CC Series; Capacitance:1 F; Capacitance Tolerance:+80%, -20%; Dielectric Characteristic:Y5V; Voltage Rating:25V; Ceramic Capacitor Case:0805 [2012 Metric] ;RoHS Compliant: Yes", Capacitance=1uF, Case/Package=0805, Case Code (Metric)=2012, Dielectric=Y5V, Manufacturer=Yageo, Manufacturer Part Number=CC0805ZRY5V8BB105, Max Operating Temperature=85°C, Min Operating Temperature=-30°C, Package Quantity=1, Supplier Part Number 1=311-1358-6-ND, Tolerance=80%, Voltage Rating=25V, Case Code (Imperial)=0805, ComponentLink6Description=https://datasheet.ciiva.com/28450/1132289-28450860.pdf?src-supplier=Element14, ComponentLink6URL=https://datasheet.ciiva.com/28450/1132289-28450860.pdf?src-supplier=Element14, Composition=Ceramic, Depth=1.25mm, Halogen Free="Halogen Free", Height=0.85mm, Lead Free="Lead Free", Length=2mm, Mount="Surface Mount", Packaging="Tape and Reel", Pricing 1="1 = 0.16000, 10 = 0.11400, 100 = 0.05340, 500 = 0.03748, 1000 = 0.03102 (USD)", Radiation Hardening=No, REACH SVHC="No SVHC", RoHS=Yes, Stock 1=144647, Supplier 1=Digi-Key, Termination=SMD/SMT, Thickness=0.033inch, Voltage Rating (DC)=25V, Weight=0.000194oz, Width=0.049inch
C11: library part C0402_10n, "Cap Ceramic 0.01uF 10V X7R 10% SMD 0402 125C Paper T/R", Capacitance=10nF, Case/Package=0402, Case Code (Metric)=1005, Dielectric=X7R, Manufacturer=Yageo, Manufacturer Part Number=CC0402KRX7R6BB103, Max Operating Temperature=125°C, Min Operating Temperature=-55°C, Supplier Part Number 1=311-1703-6-ND, Tolerance=10%, Voltage Rating=10V, Case Code (Imperial)=0402, ComponentLink1Description=https://datasheet.ciiva.com/26862/getdatasheetpartid-748492-26862629.pdf?src-supplier=Verical, ComponentLink1URL=https://datasheet.ciiva.com/26862/getdatasheetpartid-748492-26862629.pdf?src-supplier=Verical, Composition=Ceramic, Depth=0.5mm, Halogen Free="Halogen Free", Lead Free="Lead Free", Length=1mm, Mount="Surface Mount", Packaging="Tape and Reel", Pricing 1="1 = 0.10000, 10 = 0.02100, 100 = 0.00950, 500 = 0.00678, 1000 = 0.00532, 2500 = 0.00484, 5000 = 0.00445 (USD)", Radiation Hardening=No, RoHS=Yes, Stock 1=16677, Supplier 1=Digi-Key, Termination=SMD/SMT, Thickness=0.022inch, Voltage Rating (DC)=10V, Weight=2.3E-05oz, Width=0.02inch
C12: library part C1206_100u, "1206 6.3 V 100 uF ±20% Tolerance X6T Monolithic Ceramic Chip Capacitor", Capacitance=100uF, Dielectric=X6T, Manufacturer=Murata, Manufacturer Part Number=GRM31CD80J107ME39K, Supplier Part Number 1=490-16313-6-ND, Tolerance=20%, Voltage Rating (DC)=6.3V, ComponentLink1Description=http://search.murata.co.jp/Ceramy/image/img/A01X/G101/ENG/GRM31CD80J107ME39-01.pdf?src-supplier=Digi-Key, ComponentLink1URL=http://search.murata.co.jp/Ceramy/image/img/A01X/G101/ENG/GRM31CD80J107ME39-01.pdf?src-supplier=Digi-Key, ComponentLink2Description=https://search.murata.co.jp/Ceramy/image/img/A01X/G101/ENG/GRM31CD80J107ME39-01.pdf?src-supplier=Digi-Key, ComponentLink2URL=https://search.murata.co.jp/Ceramy/image/img/A01X/G101/ENG/GRM31CD80J107ME39-01.pdf?src-supplier=Digi-Key, Length=3.2mm, Pricing 1="1 = 0.73000, 10 = 0.53700, 50 = 0.42920, 100 = 0.36790, 500 = 0.29128, 1000 = 0.24529, 2500 = 0.22996 (USD)", RoHS=No, Stock 1=13511, Supplier 1=Digi-Key, Thickness=1.6mm, Width=1.6mm
C14: library part C0804_10u, "Cap Ceramic 10uF 6.3V X5R 10% SMD 0805 85C Paper T/R", Capacitance=10uF, Case/Package=0805, Case Code (Metric)=2012, Dielectric=X5R, Manufacturer=Yageo, Manufacturer Part Number=CC0805KRX5R5BB106, Max Operating Temperature=85°C, Min Operating Temperature=-55°C, Supplier Part Number 1=311-2084-6-ND, Tolerance=10%, Voltage Rating=6.3V, Case Code (Imperial)=0805, ComponentLink1Description=https://datasheet.ciiva.com/17436/upy-gphc-x5r-4v-to-50v-12-17436602.pdf?src-supplier=Avnet+Europe, ComponentLink1URL=https://datasheet.ciiva.com/17436/upy-gphc-x5r-4v-to-50v-12-17436602.pdf?src-supplier=Avnet+Europe, Composition=Ceramic, Depth=1.25mm, Dissipation Factor=10%, Halogen Free="Halogen Free", Height=1.25mm, Lead Free="Lead Free", Length=2mm, Mount="Surface Mount", Packaging="Tape and Reel", Pricing 1="1 = 0.20000, 10 = 0.13600, 50 = 0.08180, 100 = 0.06910, 500 = 0.04730, 1000 = 0.04185 (USD)", Radiation Hardening=No, REACH SVHC=Unknown, RoHS=Yes, Stock 1=6744, Supplier 1=Digi-Key, Termination=SMD/SMT, Thickness=0.053inch, Voltage Rating (DC)=6.3V, Width=0.049inch
D1 D2 D3 D4 D5 D6 D7 D8 D9 D10 D11 D12 D13 D14 D15 D16 D17 D18 D19 D20 D21 D22 D23 D24 D25 D26 D27 D28 D29 D30 D31 D32 D33 D34 D35 D36 D37 D38 D39 D40 D41 D42 D43 D44 D45 D46 D47 D48 D49 D50 D51 D52 D53 D54 D55 D56 D57 D58 D59 D60: "Led red", Case/Package=0402, Case Code (Metric)=1005, Color=Blue, Forward Current=30mA, Forward Voltage=3.3V, Illumination Color=Red, Lens Color=Colorless, Manufacturer=Everlight, Manufacturer Part Number=EAST1005BA0, Max Operating Temperature=85°C, Min Operating Temperature=-30°C, Package Quantity=1, Power Rating=75mW, Supplier Part Number 1=VLMS1500-GS08DKR-ND, Test Current=5mA, Case Code (Imperial)=0402, ComponentLink3Description=https://datasheet.ciiva.com/13945/vlmo1500-13945367.pdf?src-supplier=Digi-Key, ComponentLink3URL=https://datasheet.ciiva.com/13945/vlmo1500-13945367.pdf?src-supplier=Digi-Key, Dominant Wavelength=471nm, Height=0.45mm, Lead Free="Lead Free", Length=1mm, Lens Style=Rectangular,Square, Lens Transparency=Clear, Luminous Intensity=50mcd, Mount="Surface Mount", Number of LEDs=1, Number of Pins=2, Packaging="Tape and Reel", Pricing 1="1 = 0.48000, 10 = 0.34600, 100 = 0.15360, 500 = 0.10752, 1000 = 0.08832 (USD)", Radiation Hardening=No, REACH SVHC=Unknown, RoHS=Yes, Stock 1=50832, Supplier 1=Digi-Key, Viewing Angle=120°, Wavelength=631nm, Width=0.5mm
J1: library part H_ARDUPINS, "Sockets to connect to Arduino pins"
J2: "26*2 ROWS"
J3: library part ARDUINO_UNO_SHIELD, "Arduino UNO shield", Manufacturer=Arduino, Manufacturer Part Number=A000073, Package Quantity=1, Supplier Part Number 1=1050-1041-ND, ComponentLink6Description=https://datasheet.ciiva.com/20168/73-4443-20168541.pdf?src-supplier=Rapid+Electronics, ComponentLink6URL=https://datasheet.ciiva.com/20168/73-4443-20168541.pdf?src-supplier=Rapid+Electronics, Core Architecture=AVR, Evaluation Kit=Yes, Height=0.05inch, Length=3inch, Mount="Surface Mount", Number of Bits=8, Packaging=Bulk, Pricing 1="1 = 20.90000 (USD)", REACH SVHC=Unknown, RoHS=Yes, Stock 1=2726, Supplier 1=Digi-Key, Weight=0.02lb, Width=2.5inch
J4: library part H_JTAG, "Socket to connect to JTAG"
MH1 MH2 MH3 MH4: library part MHNP, "Mounting hole 3.2mm non plated"
R1 R2 R3 R4 R5 R6 R7 R8 R9 R10 R11 R12 R13 R14 R15 R16 R17 R18 R19 R20 R21 R22 R23 R24 R25 R26 R27 R28 R29 R30 R31 R32 R33 R34 R35 R36 R37 R38 R39 R40 R41 R42 R43 R44 R45 R46 R47 R48 R49 R50 R51 R52 R53 R54 R55 R56 R57 R58 R59 R60: library part R0402_62, "RES SMD 62 OHM 1% 1/16W 0402", Case/Package=0402, Case Code (Metric)=1005, Manufacturer=Yageo, Manufacturer Part Number=RC0402FR-0762RL, Max Operating Temperature=155°C, Min Operating Temperature=-55°C, Power Rating=63mW, Resistance=62R, Supplier Part Number 1=311-62.0LRDKR-ND, Temperature Coefficient=100ppm/°C, Tolerance=1%, Voltage Rating=50V, Case Code (Imperial)=0402, ComponentLink1Description=https://datasheet.ciiva.com/17086/pyu-rc0402-51-rohs-l-6-r-17086553.pdf?src-supplier=Future+Electronics, ComponentLink1URL=https://datasheet.ciiva.com/17086/pyu-rc0402-51-rohs-l-6-r-17086553.pdf?src-supplier=Future+Electronics, Composition="Thick Film", Depth=0.5mm, Height=0.35mm, Lead Free="Lead Free", Length=1mm, Military Standard=Not, Packaging="Tape and Reel", Pricing 1="1 = 0.10000, 10 = 0.01600, 100 = 0.00640, 1000 = 0.00289, 2500 = 0.00251, 5000 = 0.00207 (USD)", REACH SVHC=Unknown, RoHS=Yes, Stock 1=193361, Supplier 1=Digi-Key, Termination=SMD/SMT, Voltage Rating (DC)=50V, Width=0.5mm
R61: library part R0402_47K, "YAGEO - RC0402JR-0747KL - SMD Chip Resistor, 0402 [1005 Metric], 47 kohm, RC Series, 50 V, Thick Film, 63 mW", Case/Package=0402, Case Code (Metric)=1005, Manufacturer=Yageo, Manufacturer Part Number=RC0402JR-0747KL, Max Operating Temperature=155°C, Max Power Dissipation=63mW, Min Operating Temperature=-55°C, Package Quantity=1, Resistance=47kR, Supplier Part Number 1=311-47KJRDKR-ND, Temperature Coefficient=100ppm/°C, Tolerance=5%, Voltage Rating=50V, Case Code (Imperial)=0402, ComponentLink8Description=https://datasheet.ciiva.com/16740/pyu-rc0402-51-rohs-l-6-r-16740971.pdf?src-supplier=Future+Electronics, ComponentLink8URL=https://datasheet.ciiva.com/16740/pyu-rc0402-51-rohs-l-6-r-16740971.pdf?src-supplier=Future+Electronics, Composition="Thick Film", Depth=0.5mm, Features="Moisture Resistant", Height=0.016inch, Lead Free="Lead Free", Length=1mm, Military Standard=Not, Number of Terminations=2, Packaging="Tape and Reel", Power Rating=63mW, Pricing 1="1 = 0.10000, 10 = 0.01300, 100 = 0.00530, 1000 = 0.00236, 2500 = 0.00205, 5000 = 0.00169 (USD)", REACH SVHC=Unknown, RoHS=Yes, Stock 1=4044309, Supplier 1=Digi-Key, Termination=SMD/SMT, Width=0.02inch, Working Voltage=50V
R62: library part R0402_120K, "RES SMD 120K OHM 5% 1/16W 0402", Case/Package=0402, Case Code (Metric)=1005, Manufacturer=Yageo, Manufacturer Part Number=RC0402JR-07120KL, Max Operating Temperature=155°C, Min Operating Temperature=-55°C, Package Quantity=10000, Power Rating=63mW, Resistance=120kR, Supplier Part Number 1=311-120KJRDKR-ND, Temperature Coefficient=100ppm/°C, Tolerance=5%, Voltage Rating=50V, Case Code (Imperial)=0402, ComponentLink1Description=https://datasheet.ciiva.com/7850/1018594-7850140.pdf?src-supplier=Element14, ComponentLink1URL=https://datasheet.ciiva.com/7850/1018594-7850140.pdf?src-supplier=Element14, ComponentLink2Description=https://datasheet.ciiva.com/6168/1018594-6168997.pdf?src-supplier=Farnell, ComponentLink2URL=https://datasheet.ciiva.com/6168/1018594-6168997.pdf?src-supplier=Farnell, ComponentLink3Description=https://datasheet.ciiva.com/7983/1018594-7983545.pdf?src-supplier=Element14, ComponentLink3URL=https://datasheet.ciiva.com/7983/1018594-7983545.pdf?src-supplier=Element14, ComponentLink4Description=https://datasheet.ciiva.com/7850/1018594-7850141.pdf?src-supplier=Element14, ComponentLink4URL=https://datasheet.ciiva.com/7850/1018594-7850141.pdf?src-supplier=Element14, ComponentLink5Description=https://datasheet.ciiva.com/12576/pyu-rc0402-51-rohs-l-6-r-8721-12576174.pdf?src-supplier=Mouser, ComponentLink5URL=https://datasheet.ciiva.com/12576/pyu-rc0402-51-rohs-l-6-r-8721-12576174.pdf?src-supplier=Mouser, Composition="Thick Film", Depth=0.5mm, Height=0.35mm, Lead Free="Lead Free", Length=1mm, Military Standard=Not, Number of Pins=2, Packaging="Tape and Reel", Pricing 1="1 = 0.10000, 10 = 0.01300, 100 = 0.00530, 1000 = 0.00236, 2500 = 0.00205, 5000 = 0.00169 (USD)", REACH SVHC="No SVHC", RoHS=Yes, Stock 1=102829, Supplier 1=Digi-Key, Termination=SMD/SMT, Voltage Rating (DC)=50V, Width=0.5mm
R63 R64 R65: library part R0402_10K, "RES SMD 10K OHM 1% 1/16W 0402", Case/Package=0402, Case Code (Metric)=1005, Manufacturer=Yageo, Manufacturer Part Number=RC0402FR-0710KP, Max Operating Temperature=155°C, Max Power Dissipation=63mW, Min Operating Temperature=-55°C, Resistance=10kR, Supplier Part Number 1=YAG1249DKR-ND, Temperature Coefficient=150ppm/°C, Tolerance=1%, Case Code (Imperial)=0402, ComponentLink1Description=http://www.yageo.com/NewPortal/yageodocoutput?fileName=/pdf/R-Chip/PYu-RC_51_RoHS_P_0.pdf&src-supplier=Digi-Key, ComponentLink1URL=http://www.yageo.com/NewPortal/yageodocoutput?fileName=/pdf/R-Chip/PYu-RC_51_RoHS_P_0.pdf&src-supplier=Digi-Key, Composition="Thick Film", Features="Moisture Resistant", Height=0.016inch, Length=0.039inch, Number of Terminations=2, Packaging="Tape and Reel", Pricing 1="1 = 0.10000, 10 = 0.03500, 100 = 0.01400, 1000 = 0.00631, 2500 = 0.00548, 5000 = 0.00452 (USD)", RoHS=Yes, Stock 1=24916, Supplier 1=Digi-Key, Width=0.02inch
U1 U2 U3: library part XC9572XL, "XILINX - XC9572XL-10VQG44C. - CPLD, 72 MACROCELL, 3.3V, 44VQFP", Case/Package=TQFP, Case Code (Imperial)=0402, Case Code (Metric)=1005, Frequency=178MHz, Manufacturer=Xilinx, Max Frequency=100MHz, Max Operating Temperature=70°C, Max Supply Voltage=3.6V, Min Operating Temperature=0°C, Min Supply Voltage=3V, Operating Supply Voltage=3.3V, Package Quantity=160, Power Rating=63mW, Resistance=62R, Supplier Part Number 1=122-1448-ND, Temperature Coefficient=100ppm/°C, Tolerance=1%, Voltage Rating=50V, ComponentLink1Description=https://www.xilinx.com/support/documentation/data_sheets/ds057.pdf, ComponentLink1URL=https://www.xilinx.com/support/documentation/data_sheets/ds057.pdf, ComponentLink2Description=https://www.xilinx.com/support/documentation/package_specs/vq44.pdf, ComponentLink2URL=https://www.xilinx.com/support/documentation/package_specs/vq44.pdf, Composition="Thick Film", Depth=0.5mm, Height=0.35mm, Lead Free="Lead Free", Length=1mm, Manufacturer Part Number=XC9572XL-10VQG44C, Memory Type=FLASH, Military Standard=Not, Mount="Surface Mount", Number of Gates=1600, Number of I/Os=34, Number of Logic Blocks (LABs)=4, Number of Logic Elements/Cells=4, Number of Macrocells=72, Number of Pins=44, Packaging=Tray, Pricing 1="1 = 3.71000 (USD)", Propagation Delay=10ns, Radiation Hardening=No, REACH SVHC="No SVHC", RoHS=Yes, Speed Grade=10, Stock 1=4319, Supplier 1=Digi-Key, Termination=SMD/SMT, Turn-On Delay Time=10ns, Voltage Rating (DC)=50V, Width=0.5mm
U4: library part 555, "TEXAS INSTRUMENTS         NE555DR.             TIMER, SINGLE, 500KHZ, 16V, SOIC-8", Case/Package=SOIC, Frequency=100kHz, High Level Output Current=-200mA, Low Level Output Current=200mA, Manufacturer="Texas Instruments", Max Operating Temperature=70°C, Max Supply Voltage=16V, Min Operating Temperature=0°C, Min Supply Voltage=4.5V, Operating Supply Current=10mA, Package Quantity=2500, Quiescent Current=15mA, Supplier Part Number 1=296-6501-6-ND, ComponentLink7Description=https://datasheet.ciiva.com/1139/1874740-1139901.pdf?src-supplier=Element14, ComponentLink7URL=https://datasheet.ciiva.com/1139/1874740-1139901.pdf?src-supplier=Element14, Contact Plating=Gold, Height=1.58mm, Lead Free="Lead Free", Length=4.9mm, Manufacturer Part Number=NE555DR, Mount="Surface Mount", Number of Pins=8, Number of Timers/Counters=1, Packaging="Tape and Reel", Pricing 1="1 = 0.36000, 10 = 0.27500, 25 = 0.24760, 100 = 0.17100, 250 = 0.14400, 500 = 0.11700, 1000 = 0.09000 (USD)", Radiation Hardening=No, REACH SVHC="No SVHC", RoHS=Yes, Stock 1=55105, Supplier 1=Digi-Key, Weight=0.002561oz, Width=3.91mm
U5: library part MCP4725A0T, "DAC 1-CH Resistor-String 12-bit 6-Pin SOT-23A T/R", Case/Package=SOT-23-6, Input Offset Voltage (Vos)=1.1mV, Manufacturer=Microchip, Manufacturer Part Number=MCP4725A0T-E/CH, Max Operating Temperature=125°C, Max Supply Voltage=5.5V, Min Operating Temperature=-40°C, Min Supply Voltage=2.7V, Nominal Supply Current=210uA, Package Quantity=3000, Supplier Part Number 1=MCP4725A0T-E/CHDKR-ND, ComponentLink10Description=https://datasheet.ciiva.com/1359/22039d-1359789.pdf?src-supplier=Digi-Key, ComponentLink10URL=https://datasheet.ciiva.com/1359/22039d-1359789.pdf?src-supplier=Digi-Key, Contact Plating=Tin,Matte, Height=1.3mm, Integral Nonlinearity (INL)=14.5LSB, Interface=I2C,Serial,2-Wire, Lead Free="Lead Free", Length=3.1mm, Mount="Surface Mount", Number of Bits=12, Number of Channels=1, Number of Converters=1, Number of D/A Converters=1, Number of DAC Channels=1, Number of Outputs=1, Number of Pins=6, Output Type=Voltage, Packaging="Tape and Reel", Polarity=Unipolar, Pricing 1="1 = 0.96000, 25 = 0.80000, 100 = 0.73000 (USD)", Radiation Hardening=No, REACH SVHC="No SVHC", Resolution=12b, RoHS=Yes, Settling Time=6us, Stock 1=26487, Supplier 1=Digi-Key, Supply Type=Single, Termination=SMD/SMT, Width=1.8mm

## Via types
v1: diameter 0.6, hole 0.3, Top Layer to Bottom Layer, tented both sides, 127 vias

## Nets (pads, with @x,y where several pads share a name; then routed paths per layer and width w, separated by ;. In a path a pad name is that pad's centre, name@x,y a point inside that pad or via, vN(x,y) a via of type N, cw(c..) or ccw(c..) an arc to the next point about the centre after c; other vN are vias at no path point)
+3V3: C1.2 C2.2 C3.2 C4.2 C5.2 C6.2 C7.2 C8.2 C9.2 C12.2 J3.27 J4.6 R61.2 U1.15 U1.26 U1.35 U2.15 U2.26 U2.35 U3.15 U3.26 U3.35 U4.4 U4.8 | length 64.4
  Top Layer w0.4: v1(2.184,87.02) 2.208,87.044 U1.35@3.526,87.044 4.708,87.044 ; v1(3.886,91.465) 3.916,91.495 C7.2@5.699,91.495 5.449,91.245 5.048,91.245 4.426,90.624 4.426,88.579 4.581,88.424 4.581,87.171 4.708,87.044 ; U1.26@10.626,89.344 10.626,87.527 10.144,87.044 4.708,87.044 ; C1.2@12.262,91.49 C12.2@14.818,91.49 14.818,89.78 v1(14.834,89.764) ; v1(12.862,82.231) 12.875,82.244 U1.15@14.526,82.244 15.554,82.244 16.122,81.677 16.122,78.124 C4.2@16.342,78.124 ; v1(13.767,10.477) 14.647,10.477 U4.4@14.691,10.433 ; v1(17.704,18.237) 18.43,17.511 19.013,17.511 C2.2@19.263,17.261 19.463,17.261 19.996,16.728 19.996,16.579 20.497,16.077 U2.26@21.408,16.077 23.555,16.077 v1(23.58,16.052) ; R61.2@18.495,3.326 18.495,5.327 U4.8@18.501,5.333 18.501,5.633 18.551,5.683 18.851,5.683 19.735,6.567 23.708,6.567 U2.35@23.708,8.977 ; C5.2@23.774,6.501 23.774,4.979 v1(23.8,4.953) ; v1(28.508,18.363) U2.15@28.508,19.977 28.508,21.767 C8.2@28.738,21.996 ; C6.2@39.125,11.406 39.275,11.556 40.107,11.556 ; v1(40.792,13.106) 40.738,13.106 40.587,12.956 40.556,12.956 40.175,12.575 40.175,11.624 40.107,11.556 ; U3.35@41.322,11.556 40.107,11.556 ; v1(46.99,15.926) 47.014,15.95 C9.2@48.361,15.95 48.422,15.889 U3.26@48.422,13.856 ; v1(50.369,6.858) 50.472,6.756 U3.15@52.322,6.756 54.194,6.756 C3.2@54.432,6.518
+5: C13.2 J3.26 R64.2 R65.2 U5.3 | length 53.1
  Top Layer w0.4: U5.3@9.87,29.946 9.87,29.846 9.77,29.846 8.924,29.001 7.99,29.001 C13.2@7.909,28.919 ; R65.2@10.728,25.664 10.725,25.661 8.561,25.661 7.909,26.313 C13.2@7.909,28.919 ; v1(12.141,53.391) 8.153,53.391 4.928,50.165 4.928,29.154 5.162,28.919 C13.2@7.909,28.919
  Bottom Layer w0.4: v1(12.141,53.391) 13.767,53.391 17.094,56.718 17.094,60.289 J3.26@18.78,61.975
A0: J1.1 J3.22 | length 7.9
  Bottom Layer w0.3: J1.1@11.516,47.675 15.351,47.675 16.951,49.275 J3.22@18.78,49.275
A1: J1.2 J3.21 | length 7.9
  Bottom Layer w0.3: J1.2@11.516,45.135 15.351,45.135 16.951,46.735 J3.21@18.78,46.735
A2: J1.3 J3.20 | length 7.9
  Bottom Layer w0.3: J1.3@11.516,42.595 15.351,42.595 16.951,44.195 J3.20@18.78,44.195
CLK: J3.13 U1.40 U2.40 U3.40 | length 191.4
  Top Layer w0.3: v1(3.226,12.7) 3.226,15.367 2.576,16.016 2.576,82.623 2.948,82.994 3.476,82.994 U1.40@3.526,83.044 ; U1.40@3.324,83.052 v1(4.942,83.052) ; U2.40@27.708,8.977 27.758,8.927 27.758,7.937 29.588,6.108 v1(31.719,6.108) ; v1(35.976,6.095) 37.436,7.556 U3.40@41.322,7.556 ; v1(61.417,68.351) 66.812,68.351 J3.13@67.04,68.579
  Bottom Layer w0.3: v1(3.226,12.7) 8.753,7.173 25.094,7.173 26.16,6.108 35.963,6.108 v1(35.976,6.095) ; v1(4.942,83.052) 5.92,83.052 9.466,86.598 14.283,86.598 19.669,81.212 48.557,81.212 v1(61.417,68.351)
D0: J1.4 J3.6 | length 62.7
  Top Layer w0.3: v1(28.27,40.215) 53.448,40.215 58.42,45.187 v1(58.42,49.936) ; v1(63.611,49.681) 64.017,49.275 J3.6@67.04,49.275
  Bottom Layer w0.3: J1.4@11.516,40.055 11.676,40.215 v1(28.27,40.215) v1@28.296,40.215 ; v1(58.42,49.936) 63.285,49.936 63.54,49.681 v1(63.611,49.681)
D1: J1.5 J3.7 | length 66.4
  Top Layer w0.3: v1(28.169,37.675) 30.073,39.58 53.829,39.58 59.182,44.933 59.182,52.045 59.944,52.807 62.509,52.807 63.501,51.815 J3.7@67.04,51.815
  Bottom Layer w0.3: J1.5@11.516,37.515 11.676,37.675 v1(28.169,37.675)
D2: J1.6 U5.1 | length 5.1
  Top Layer w0.3: J1.6@11.516,34.975 11.516,34.623 11.77,34.369 U5.1@11.77,29.946
DATA: J3.12 U1.39 U2.39 U3.39 | length 196.5
  Top Layer w0.3: v1@2.565,13.538 2.54,13.564 2.597,13.621 2.597,13.757 2.631,13.791 2.631,15.015 2.032,15.615 2.032,83.033 2.794,83.794 3.476,83.794 U1.39@3.526,83.844 ; U1.39@3.476,83.852 v1(4.942,83.852) ; U2.39@26.908,8.977 26.958,8.927 26.958,7.848 29.499,5.308 v1(31.988,5.308) ; v1(34.223,5.358) 37.22,8.356 U3.39@41.322,8.356
  Bottom Layer w0.3: v1(2.54,13.487) 2.54,12.467 8.333,6.673 24.887,6.673 26.252,5.308 34.172,5.308 v1(34.223,5.358) ; v1(4.942,83.852) 6.013,83.852 9.259,87.098 14.49,87.098 19.876,81.712 49.2,81.712 64.873,66.039 J3.12@67.04,66.039
GND: C1.1 C2.1 C3.1 C4.1 C5.1 C6.1 C7.1 C8.1 C9.1 C10.1 C11.1 C12.1 C13.1 C14.1 D1.2 D2.2 D3.2 D4.2 D5.2 D6.2 D7.2 D8.2 D9.2 D10.2 D11.2 D12.2 D13.2 D14.2 D15.2 D16.2 D17.2 D18.2 D19.2 D20.2 D21.2 D22.2 D23.2 D24.2 D25.2 D26.2 D27.2 D28.2 D29.2 D30.2 D31.2 D32.2 D33.2 D34.2 D35.2 D36.2 D37.2 D38.2 D39.2 D40.2 D41.2 D42.2 D43.2 D44.2 D45.2 D46.2 D47.2 D48.2 D49.2 D50.2 D51.2 D52.2 D53.2 D54.2 D55.2 D56.2 D57.2 D58.2 D59.2 D60.2 J2.2 J3.15 J3.24 J3.25 J4.5 R63.1 U1.4 U1.17 U1.25 U2.4 U2.17 U2.25 U3.4 U3.17 U3.25 U4.1 U5.2 | length 235.1
  Top Layer w0.4: C7.1@5.699,93.395 5.724,93.42 6.715,93.42 v1(7.401,94.106) ; v1(5.918,30.836) 5.934,30.819 C13.1@7.909,30.819 10.515,30.819 10.82,30.515 U5.2@10.82,29.946 U5.2@10.82,29.846 ; U1.4@7.426,78.344 7.426,80.34 v1(7.452,80.365) ; v1(9.001,91.49) C1.1@10.362,91.49 10.362,91.29 10.612,91.04 10.812,91.04 11.426,90.426 U1.25@11.426,89.344 ; D58.2@9.407,35.45 9.507,35.55 9.855,35.55 10.195,35.889 10.195,38.124 ; D57.2@9.407,37.99 9.507,38.09 10.16,38.09 10.195,38.124 ; D56.2@9.407,40.53 10.126,40.53 10.195,40.461 ; D55.2@9.407,43.07 10.152,43.07 10.195,43.027 ; D54.2@9.407,45.61 10.187,45.61 10.195,45.617 ; D53.2@9.407,48.15 9.48,48.077 10.033,48.077 10.195,47.915 ; v1(10.195,49.072) 10.195,47.915 ; v1(11.287,5.257) 11.297,5.267 C10.1@12.608,5.267 12.436,5.439 C11.1@12.436,7.136 ; v1@12.531,83.844 U1.17@14.526,83.844 ; v1(12.557,25.298) 12.576,25.318 R63.1@12.576,26.288 ; C14.1@13.063,70.521 13.063,71.964 v1(13.115,72.016) ; v1(16.332,74.955) 16.342,74.965 C4.1@16.342,76.224 ; C12.1@17.318,91.49 v1(18.882,91.49) ; v1(18.495,8.66) 18.501,8.666 U4.1@18.501,10.433 ; C2.1@19.263,19.161 19.44,19.339 v1(19.44,20.268) ; U2.25@21.408,16.877 v1(22.971,16.877) ; D27.2@25.478,28.574 D26.2@25.478,31.114 D25.2@25.478,33.654 D24.2@25.478,36.194 D23.2@25.478,38.861 D22.2@25.478,41.274 D21.2@25.478,43.814 D20.2@25.478,46.354 D19.2@25.478,48.894 D18.2@25.478,51.434 D17.2@25.478,53.974 D16.2@25.478,56.514 D15.2@25.478,59.054 D14.2@25.478,61.594 D13.2@25.478,64.134 D12.2@25.478,66.674 D11.2@25.478,69.214 D10.2@25.478,71.754 D9.2@25.478,74.294 D8.2@25.478,76.834 D7.2@25.478,79.374 D6.2@25.478,81.914 D5.2@25.478,84.454 D4.2@25.478,86.994 D3.2@25.478,89.534 D2.2@25.478,93.534 ; D1.2@25.478,96.074 D2.2@25.478,93.534 ; v1(25.638,5.003) 25.638,6.212 25.801,6.374 C5.1@25.674,6.501 ; C8.1@26.838,21.996 26.908,21.926 U2.17@26.908,19.977 v1(26.908,18.439) ; J2.2@30.21,93.534 D2.2@25.478,93.534 ; v1(30.302,13.005) 30.43,12.877 U2.4@32.408,12.877 ; D59.2@37.609,1.879 D60.2@37.609,3.174 37.609,4.35 v1(37.627,4.368) ; C6.1@39.125,13.306 39.325,13.306 39.575,13.556 39.575,13.756 39.599,13.779 39.599,14.427 v1(39.624,14.453) ; v1(45.222,1.548) U3.4@45.222,2.856 ; v1(49.222,12.077) U3.25@49.222,13.856 49.222,14.911 49.811,15.5 50.011,15.5 50.261,15.75 C9.1@50.261,15.95 ; v1(50.352,8.33) 50.378,8.356 U3.17@52.322,8.356 54.37,8.356 C3.1@54.432,8.418 ; J2.2@55.661,93.534 56.851,93.534 60.471,89.913 60.521,89.913 60.621,89.813 D52.2@60.621,89.763 D51.2@60.621,87.223 D50.2@60.621,84.683 D49.2@60.621,82.143 D48.2@60.621,79.603 D47.2@60.621,77.063 D46.2@60.621,74.523 60.621,73.152 ; v1(59.08,59.257) 59.106,59.283 D40.2@60.596,59.283 D39.2@60.596,56.743 D38.2@60.596,54.203 ; v1@59.132,61.823 D41.2@60.621,61.823 ; v1@59.132,64.363 D42.2@60.621,64.363 D43.2@60.621,66.903 D44.2@60.621,69.443 ; v1@60.596,27.314 D28.2@60.596,28.803 D29.2@60.596,31.343 D30.2@60.596,33.883 D31.2@60.596,36.423 D32.2@60.596,38.963 D33.2@60.596,41.503 D34.2@60.596,44.043 ; D35.2@60.596,46.583 60.596,47.854 ; D37.2@60.596,51.663 D36.2@60.596,49.123 60.596,47.854 ; D45.2@60.621,71.983 60.621,73.152 ; v1(62.222,47.88) 62.196,47.854 60.596,47.854 ; J3.15@67.04,73.659 62.254,73.659 61.747,73.152 60.621,73.152 ; 10.195,38.124 10.195,40.461 ; 10.195,40.461 10.195,43.027 ; 10.195,43.027 10.195,45.617 ; 10.195,45.617 10.195,47.915
  Top Layer w1: J2.2@30.21,93.534 J2.2@30.261,93.534 J2.2@32.801,93.534 J2.2@35.341,93.534 J2.2@37.881,93.534 J2.2@40.421,93.534 J2.2@45.501,93.534 J2.2@48.041,93.534 J2.2@50.53,93.534 ; J2.2@50.581,93.534 J2.2@53.121,93.534 J2.2@55.661,93.534
  other v1: 60.622,27.288 59.106,61.797 59.106,64.337 12.506,83.87
LATCH1: J3.9 U1.41 | length 81.3
  Top Layer w0.3: U1.41@3.324,82.252 v1(4.942,82.252)
  Bottom Layer w0.3: v1(4.942,82.252) 5.827,82.252 9.673,86.098 14.076,86.098 19.462,80.712 44.967,80.712 63.62,62.059 67.71,62.059 68.776,60.992 68.776,59.251 68.041,58.516 67.137,58.516 J3.9@67.04,58.419
LATCH2: J3.10 U2.41 | length 82.7
  Top Layer w0.3: U2.41@28.508,8.977 28.558,8.927 28.558,7.963 29.741,6.781 31.216,6.781 34.62,10.185 34.62,12.243 38.405,16.027 v1(45.288,16.027)
  Bottom Layer w0.3: v1(45.288,16.027) 47.447,18.186 56.363,18.186 65.94,27.764 65.94,60.278 66.392,60.729 66.81,60.729 J3.10@67.04,60.959
LATCH3: J3.11 U3.41 | length 76.1
  Top Layer w0.3: U3.41@41.322,6.756 42.011,6.756 43.536,8.28 43.536,10.338 v1(43.586,10.338) ; v1(52.705,63.322) 66.863,63.322 J3.11@67.04,63.499
  Bottom Layer w0.3: v1(43.586,10.338) 43.586,26.006 52.705,35.124 v1(52.705,63.322)
LED0: R1.1 U1.30 | length 16.4
  Top Layer w0.3: U1.30@7.426,89.344 7.426,92.68 8.929,94.182 17.173,94.182 R1.1@19.065,96.074
LED1: R2.1 U1.29 | length 14.6
  Top Layer w0.3: U1.29@8.226,89.344 8.226,92.773 8.988,93.534 R2.1@19.065,93.534
LED2: R3.1 U1.28 | length 12.5
  Top Layer w0.3: v1(8.976,87.832) 9.026,87.883 U1.28@9.026,89.344 ; v1(18.374,88.67) 18.374,88.843 18.965,89.434 19.065,89.434 R3.1@19.065,89.534
  Bottom Layer w0.3: v1(8.976,87.832) 8.976,87.888 9.545,88.457 18.079,88.457 18.292,88.67 v1(18.374,88.67)
LED3: R4.1 U1.27 | length 11.8
  Top Layer w0.3: v1(9.814,87.807) U1.27@9.814,89.856 ; v1(18.374,87.654) 18.405,87.654 18.965,87.094 19.065,87.094 R4.1@19.065,86.994
  Bottom Layer w0.3: v1(9.814,87.807) 9.814,87.629 9.839,87.654 v1(18.374,87.654)